# Altium PCB Sound_Card_PCB.PcbDoc (part 1 of 2)
Units mil, origin at the board's own origin, x right, y up, seen from the top; angles counter-clockwise.
Board outline 5600 x 4000 mil, 4 copper layers (Top Layer, Plane(Gnd), Plane(Power), Bottom Layer), stack 23.756 mil thick; 267 components, 253 nets, 692 pads, 200 vias.
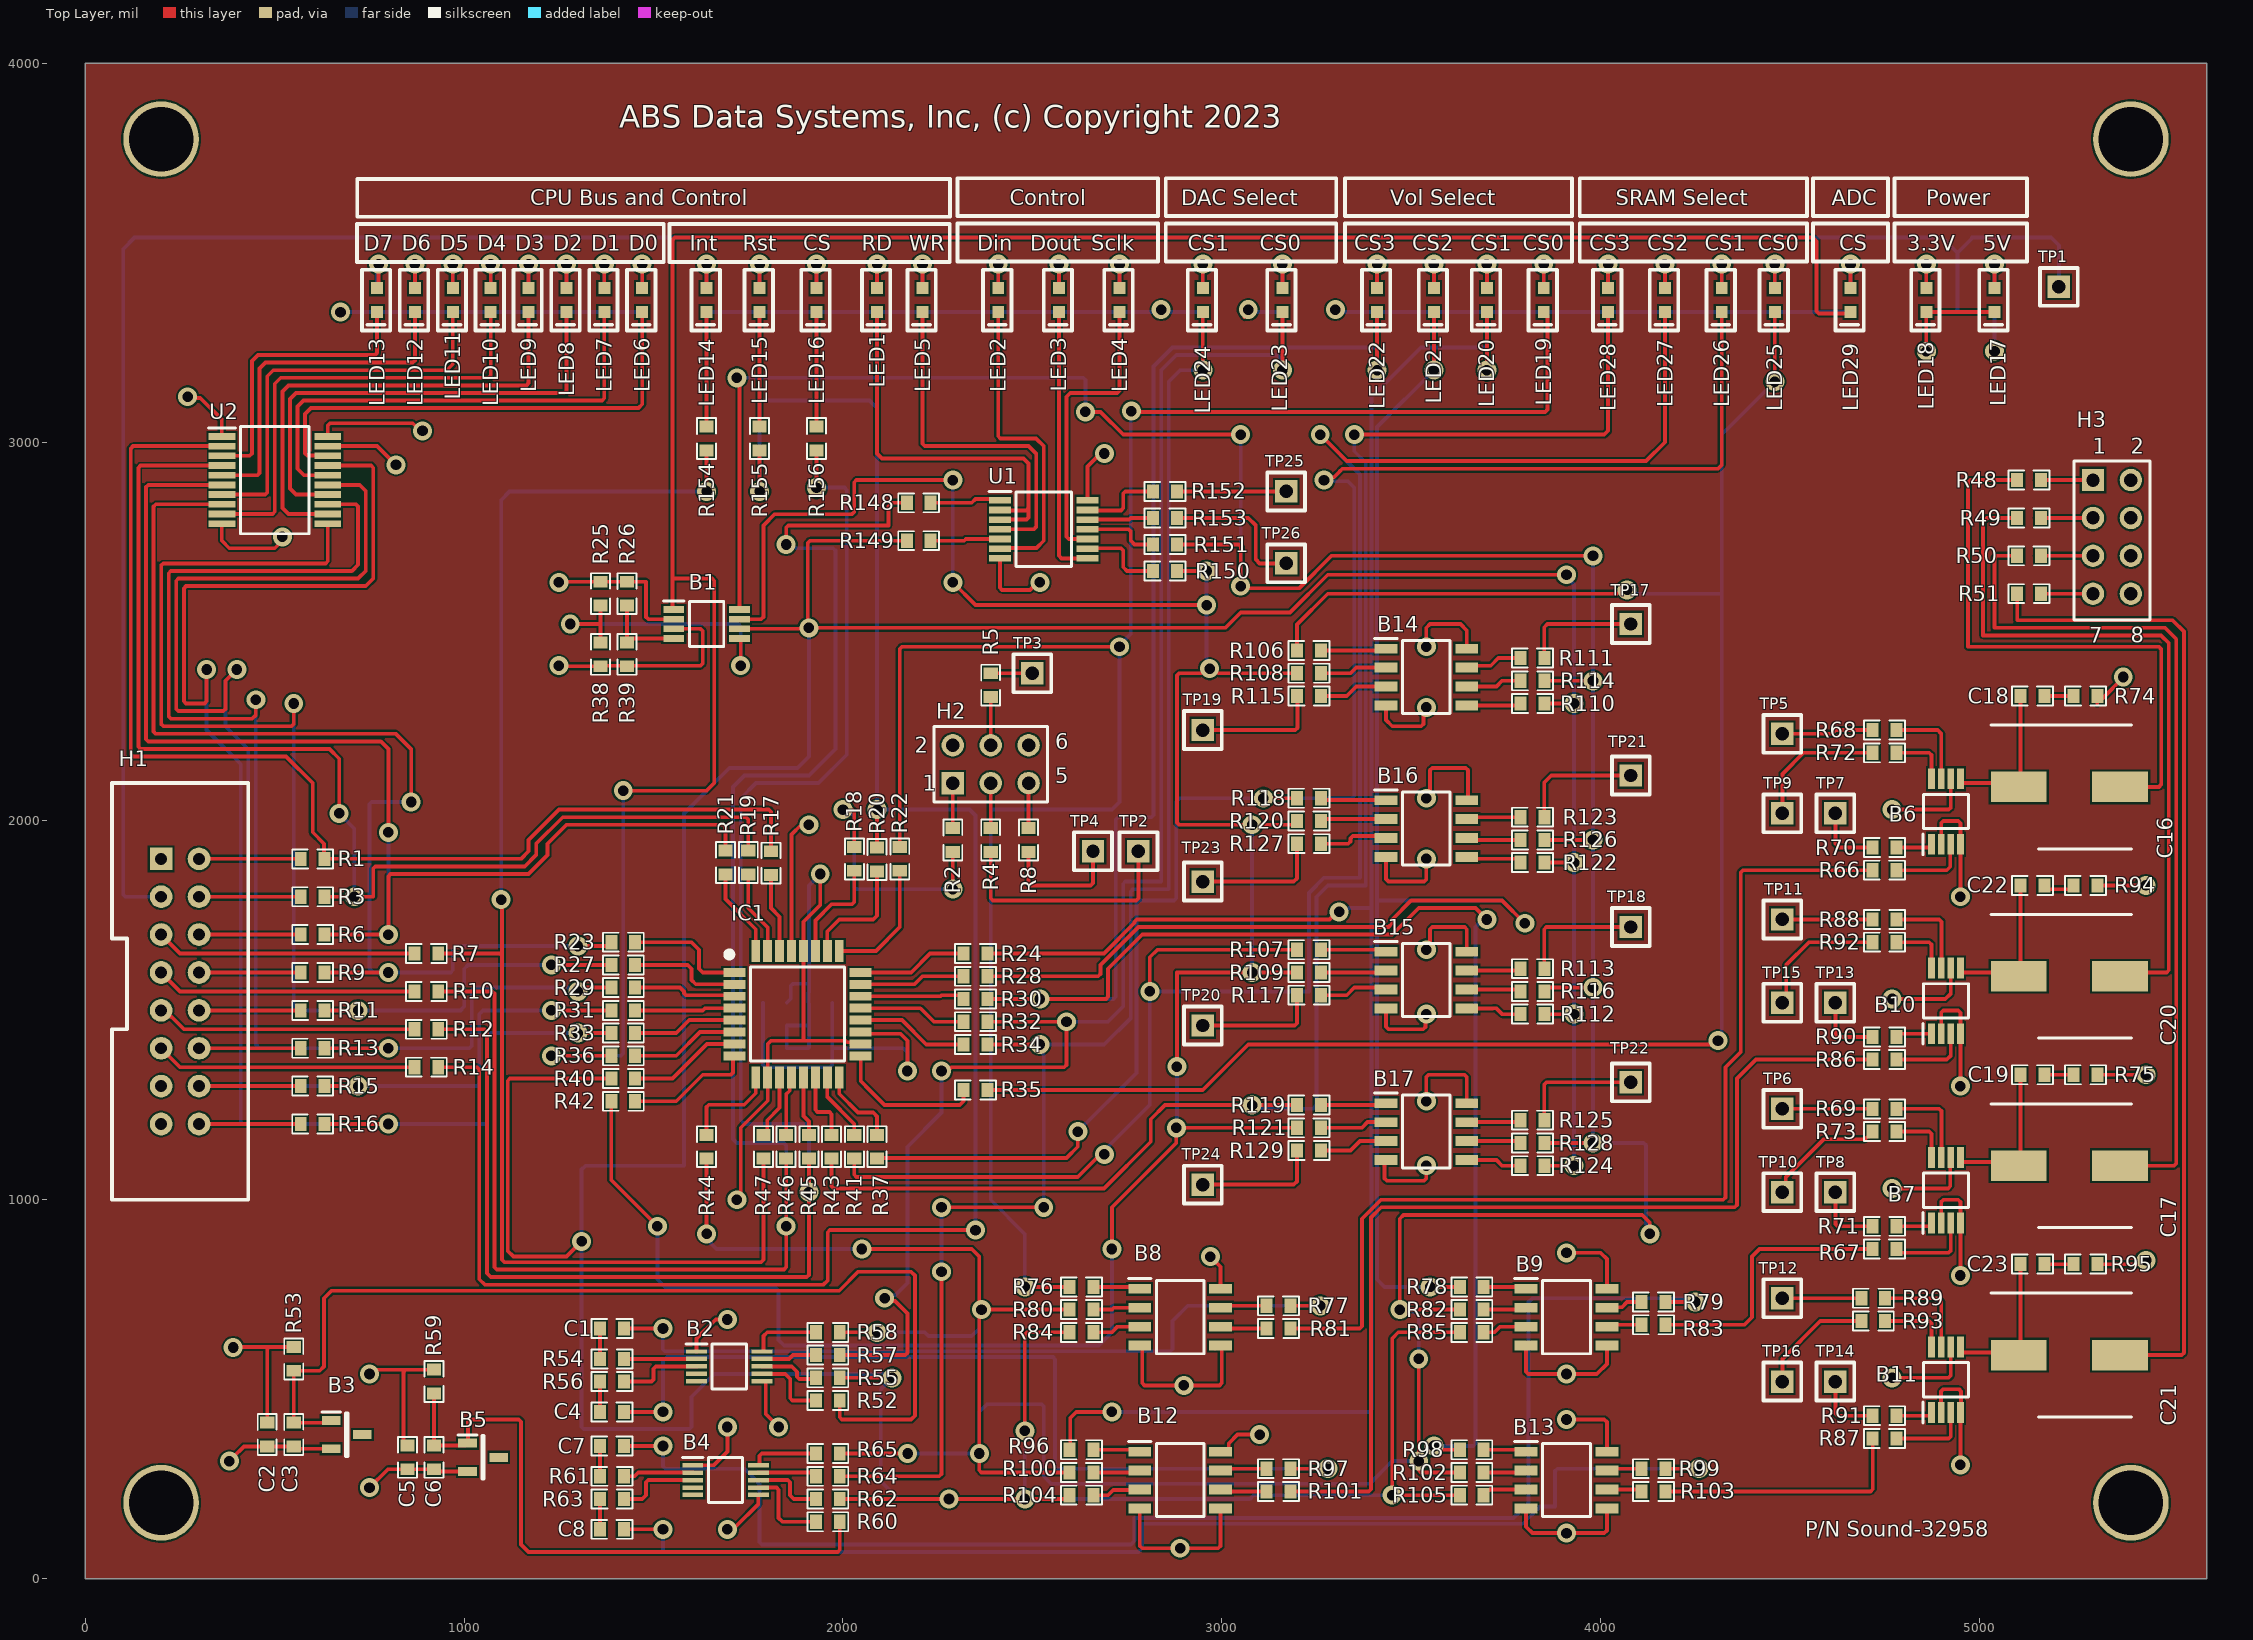
[diagram p0: Top Layer view]
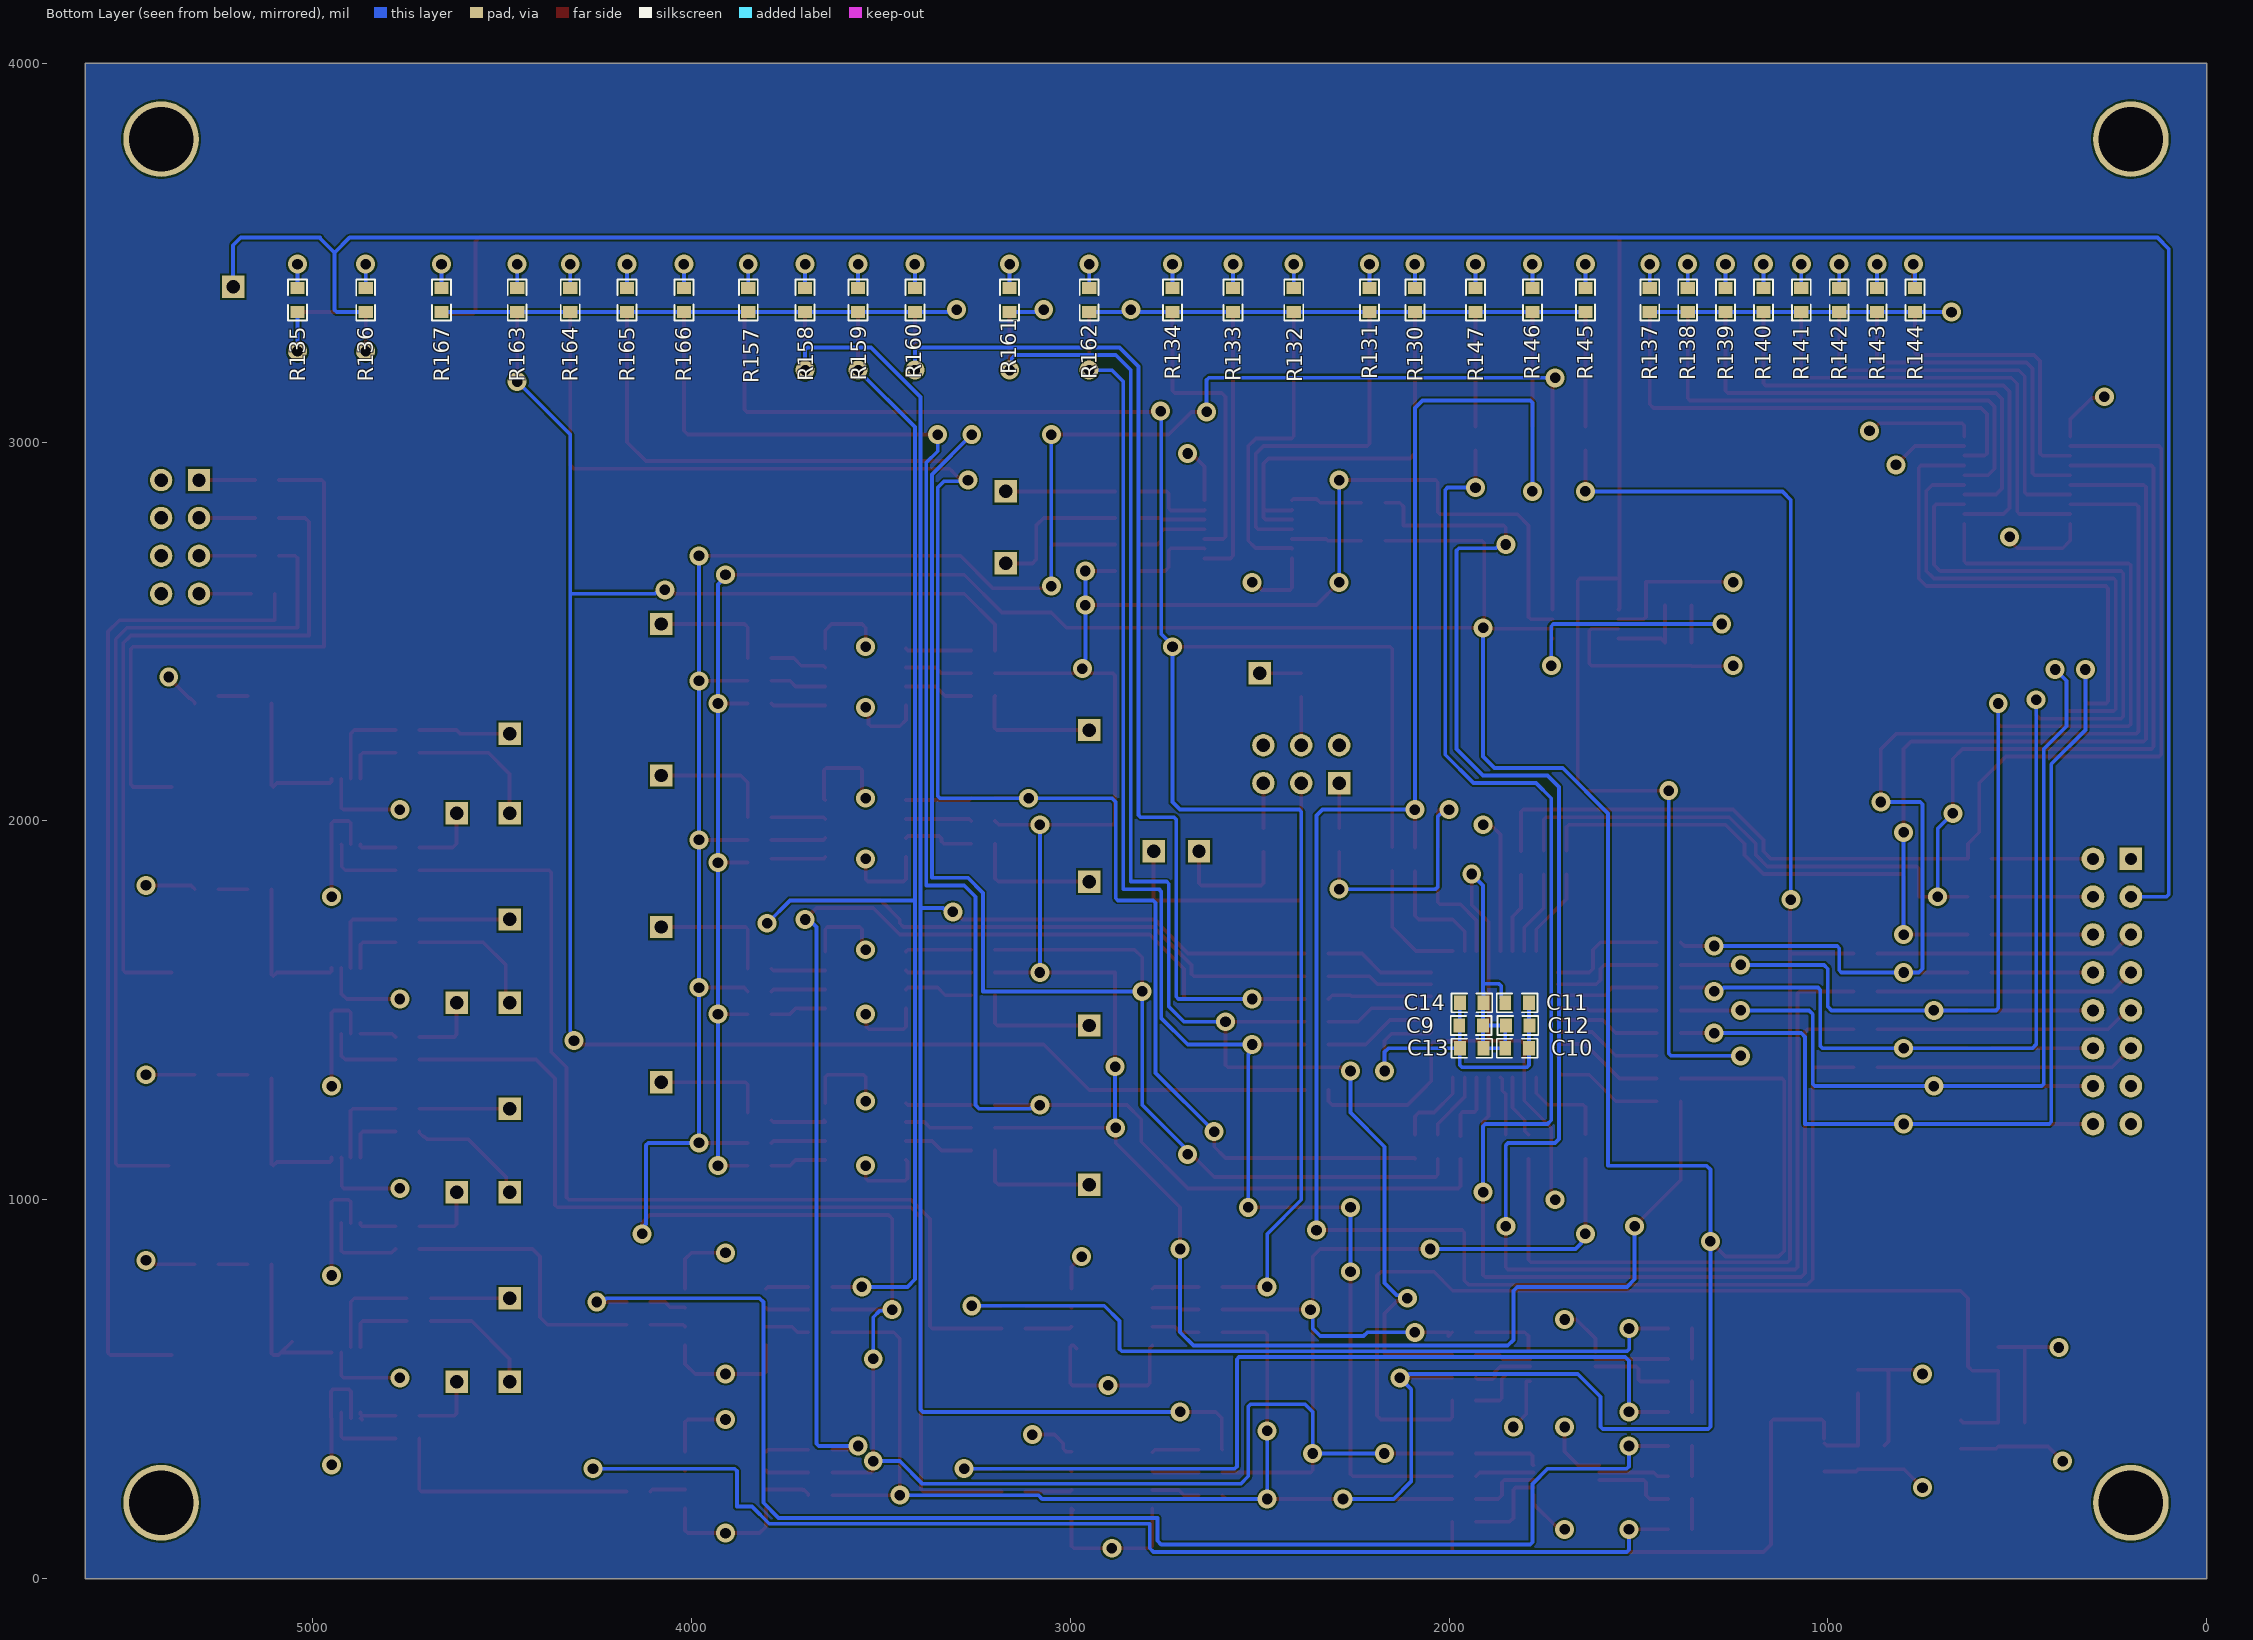
[diagram p1: Bottom Layer view, seen from below]
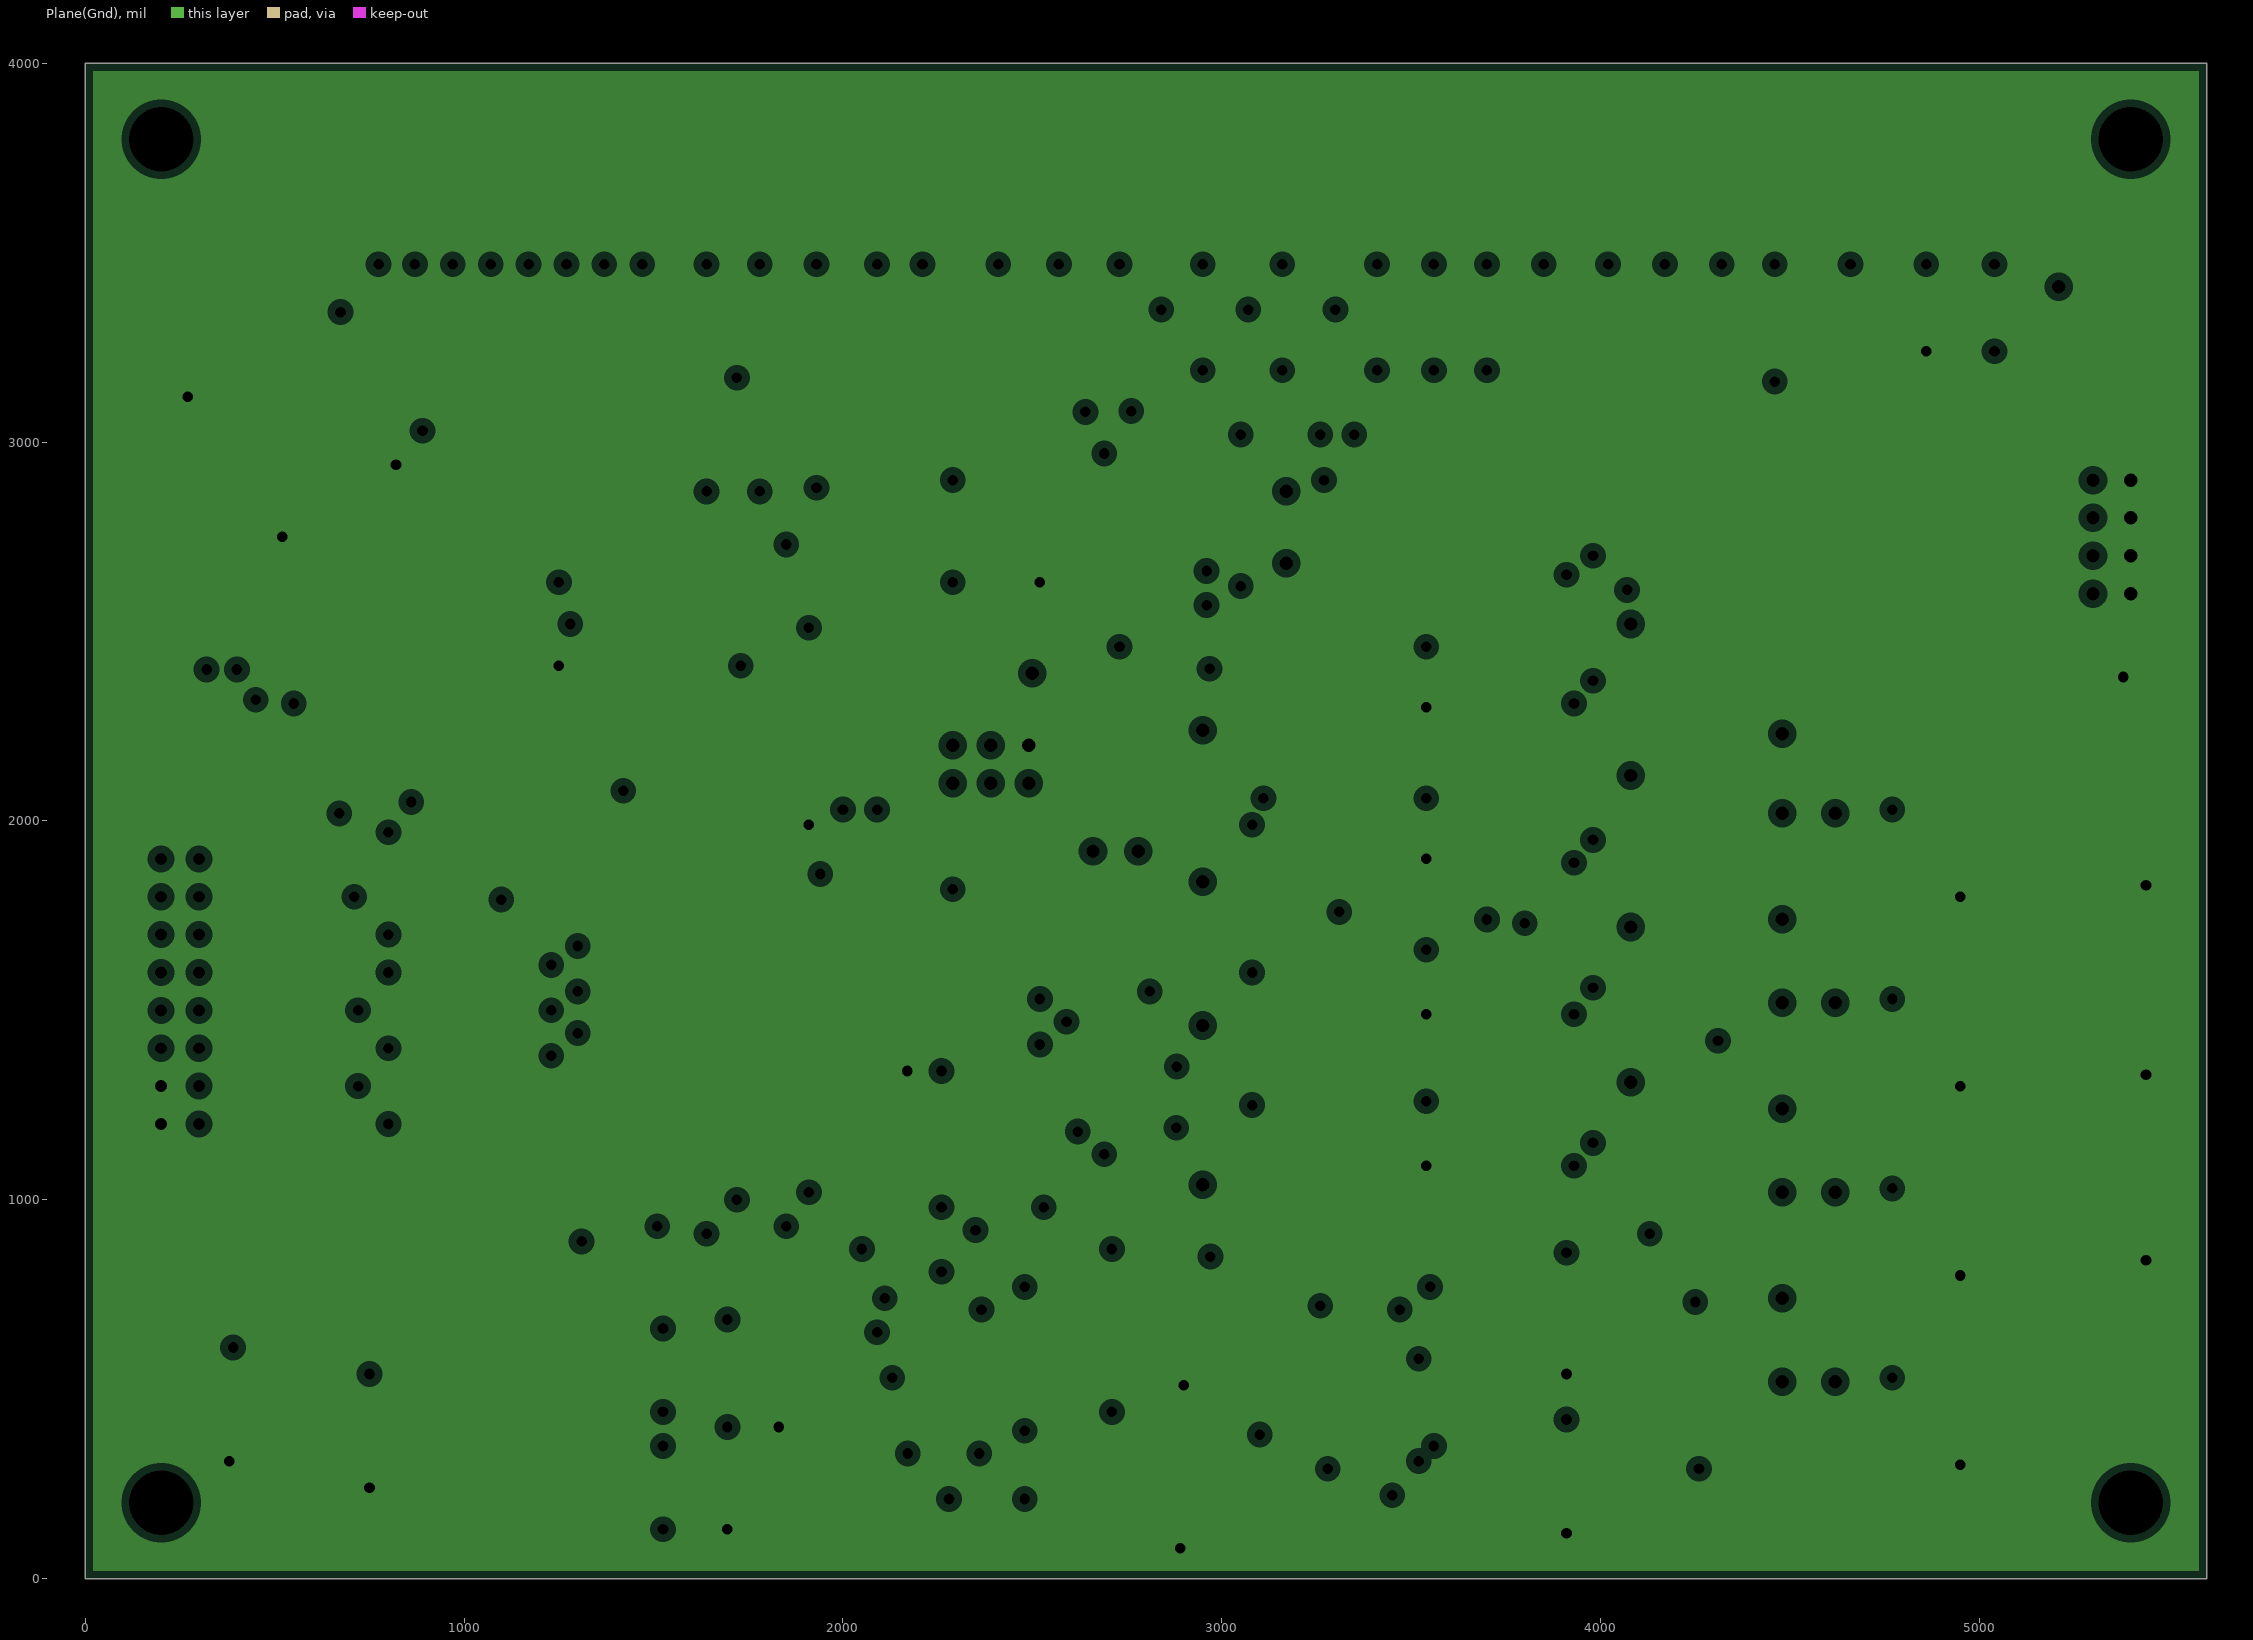
[diagram p2: Plane(Gnd), clearances drawn from the general rule]
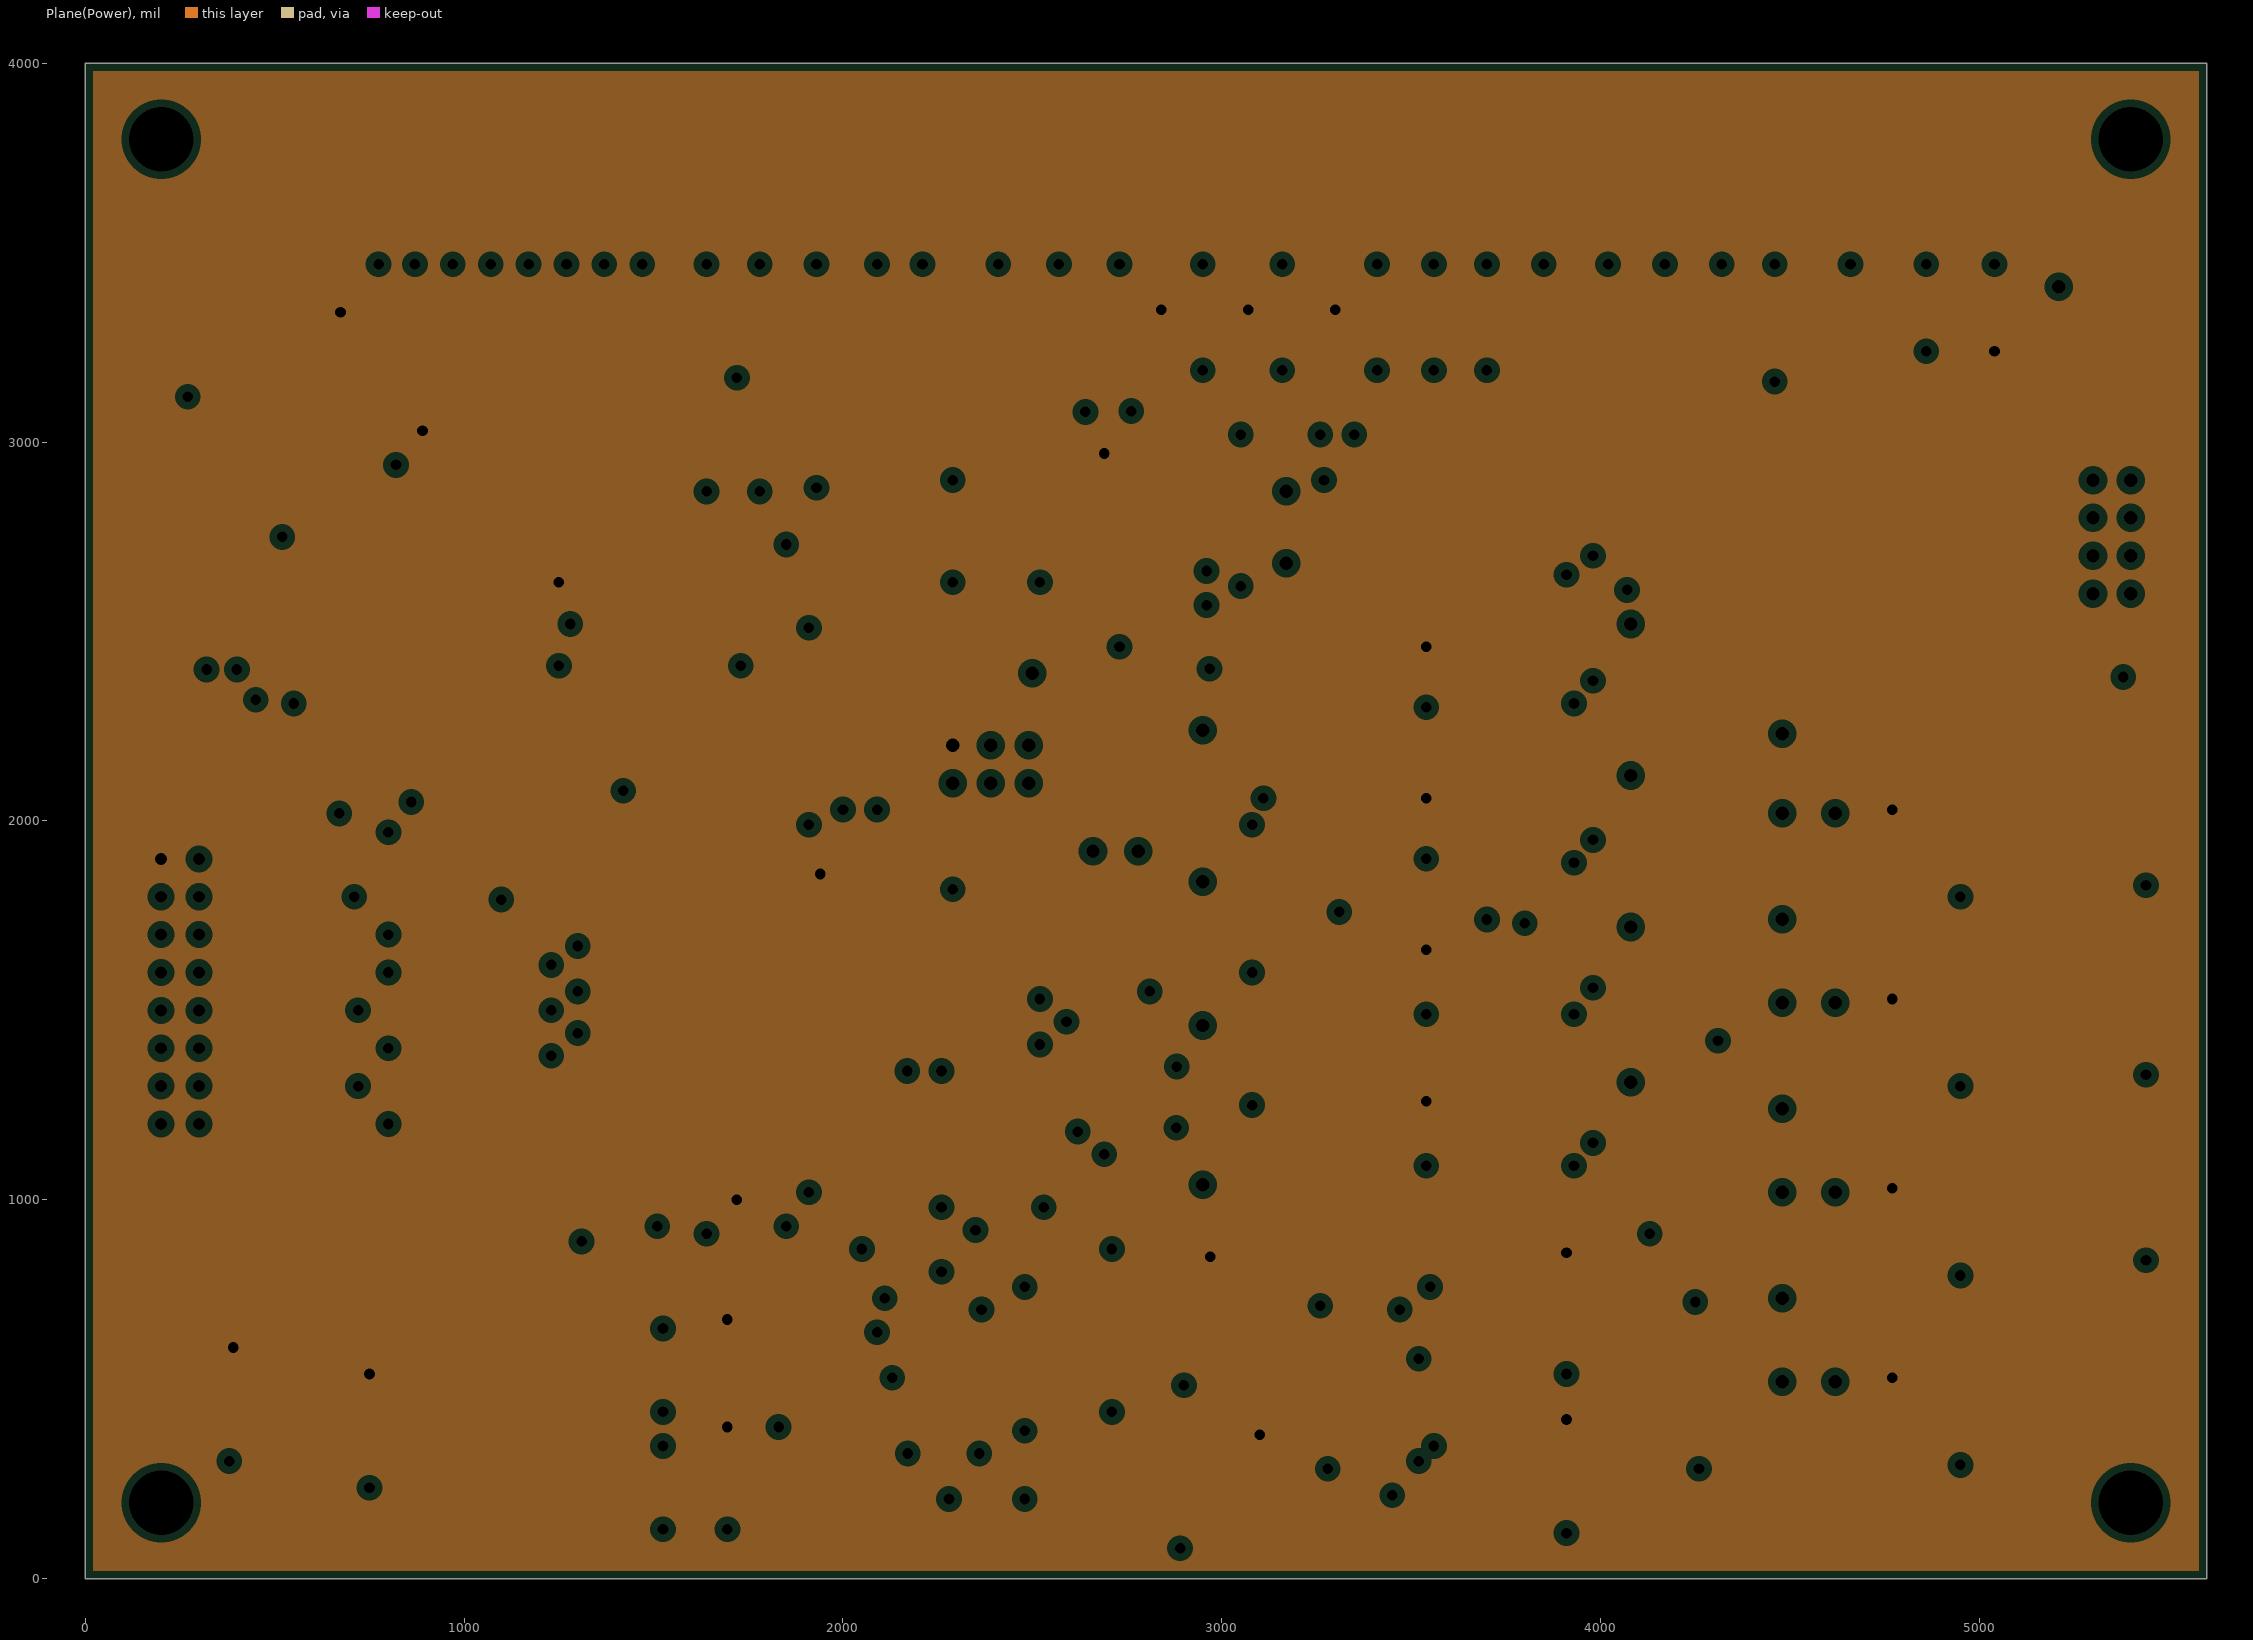
[diagram p3: Plane(Power), clearances drawn from the general rule]
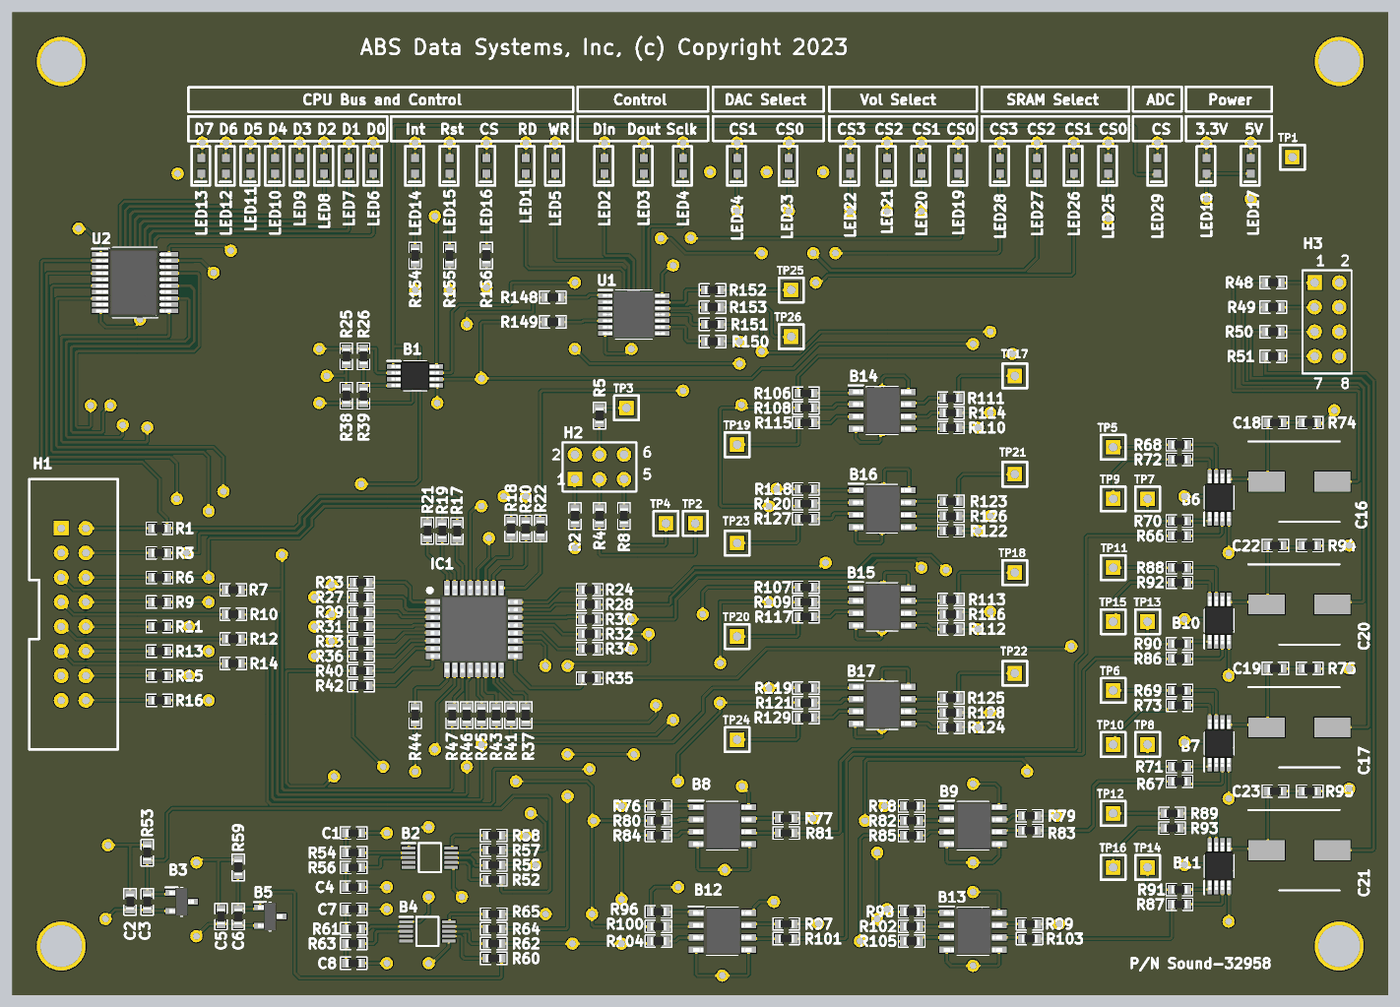
[diagram p5: 3D render of the assembled board from above, using the file's embedded part models]
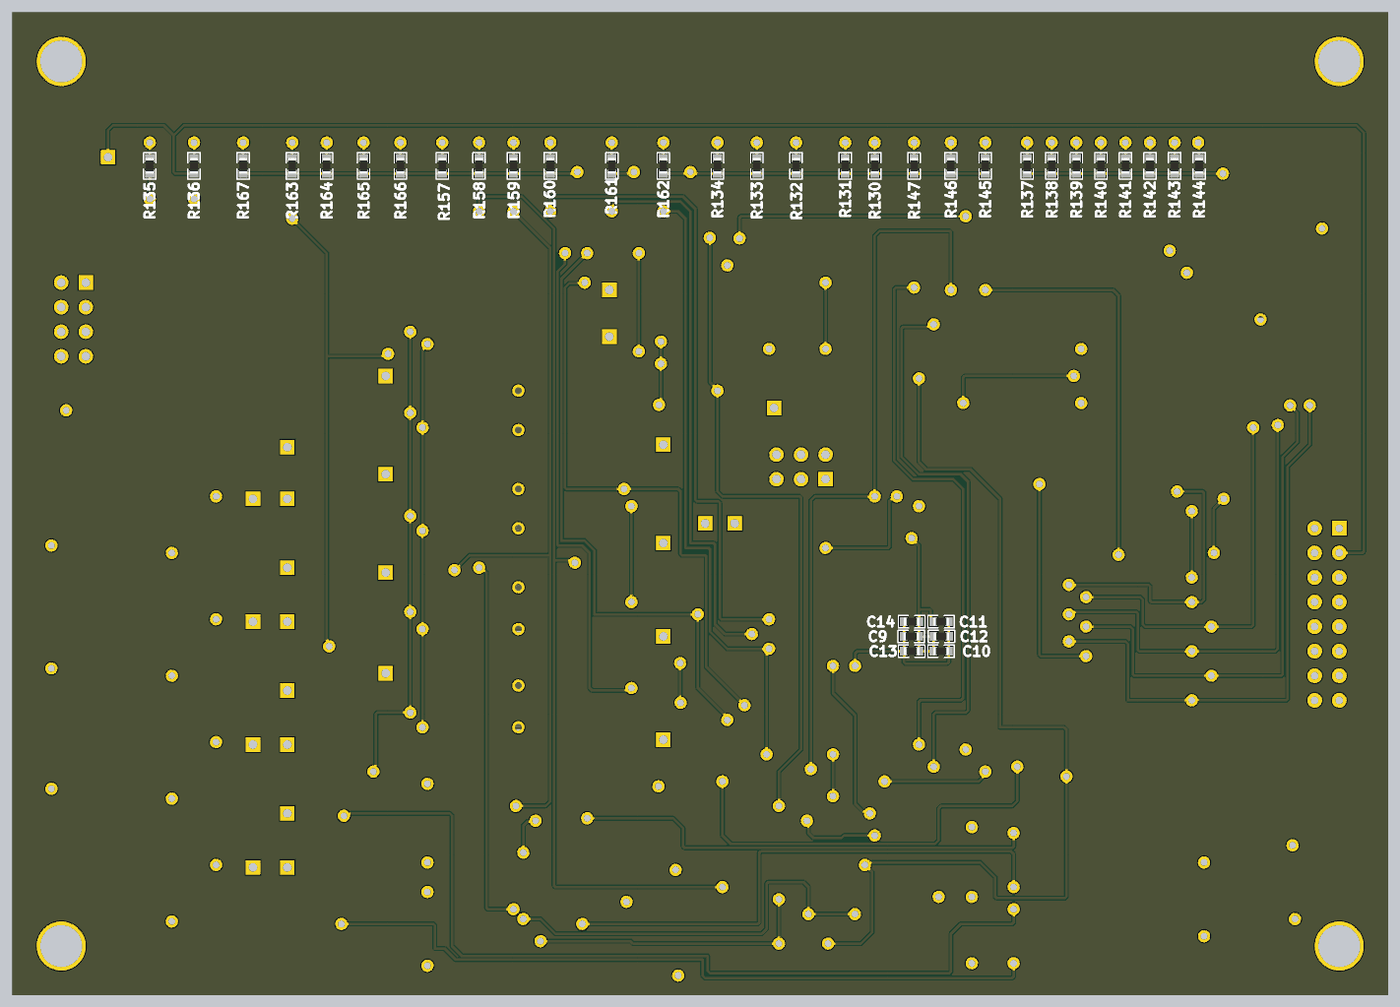
[diagram p6: 3D render of the assembled board from below, using the file's embedded part models]

## Layer stack, top to bottom
Top Solder: solder mask 0.4, Solder Resist, Dk 3.5
Top Layer: signal copper 1.4
Dielectric 2: prepreg 2.8, PP-006, Dk 4.1
Plane(Gnd): plane copper 1.378, net GND
Dielectric 1: dielectric 12.6, FR-4, Dk 4.8
Plane(Power): plane copper 1.378, net +5
Dielectric 3: prepreg 2.8, PP-006, Dk 4.1
Bottom Layer: signal copper 1.4
Bottom Solder: solder mask 0.4, Solder Resist, Dk 3.5

## Board outline
0,0 0,4000 5600,4000 5600,0

## Design rules (kind name [scope] priority, off if disabled: settings)
Clearance [All] p1: gap=5 ignorepadtopadclearanceinfootprint=FALSE
HoleSize [All] p1: absolutevalues=TRUE maxlimit=200 minlimit=1 maxpercent=80.000 minpercent=20.000
HoleToHoleClearance [All] p1: gap=5 allowstackedmicrovias=TRUE
MinimumSolderMaskSliver [All] p1: minsoldermaskwidth=5
PlaneClearance [All] p1: clearance=20
PlaneConnect [All] p1: planeconnectstyle=Relief reliefexpansion=20 reliefentries=4 reliefconductorwidth=10 reliefairgap=10
PolygonConnect [All] p1: connectstyle=Relief reliefconductorwidth=10 reliefentries=4 polygonreliefangle="90 Angle" airgapwidth=10
RoutingVias [All] p1: holewidth=28 width=50 viastyle="Through Hole" minholewidth=28 minwidth=50 maxholewidth=28 maxwidth=50
SilkToSilkClearance [All] p1: silktosilkclearance=4
SilkToSolderMaskClearance [IsPad] p1: minsilkscreentomaskgap=3.5 clearancetoexposedcopper=TRUE
SolderMaskExpansion [All] p1: expansion=4 istentingtop=FALSE
Width [All] p1: maxlimit=10 minlimit=5 preferedwidth=10 minimp=50.000000 maximp=50.000000 favimp=50.000000
23 further rules are at their usual default settings.

## Components (designator, comment, footprint, x,y, rotation, side; value= is the part's Value field where it differs from the comment)
B1 "ADC122S021CIMMX_NOPB" SOP65P490X110-8N 1640,2520 r0 top
B2 "DAC122S085CIMM_NOPB" SOP50P490X110-10N 1700,560 r0 top locked
B3 "LM4050CIM3X-4.1_NOPB" SOT95P237X95-3N 690,380 r0 top
B4 "DAC122S085CIMM_NOPB" SOP50P490X110-10N 1690,260 r0 top locked
B5 "LM4050CIM3X-4.1_NOPB" SOT95P237X95-3N 1050,320 r0 top locked
B6 "LM386MMX-1_NOPB" SOP65P490X110-8N 4912,2025 r90 top locked
B7 "LM386MMX-1_NOPB" SOP65P490X110-8N 4912,1025 r90 top locked
B8 "MCP4131-103E_SN" SOIC127P600X175-8N 2890,690 r0 top locked
B9 "MCP4131-103E_SN" SOIC127P600X175-8N 3910,690 r0 top locked
B10 "LM386MMX-1_NOPB" SOP65P490X110-8N 4912,1525 r90 top locked
B11 "LM386MMX-1_NOPB" SOP65P490X110-8N 4912,525 r90 top locked
B12 "MCP4131-103E_SN" SOIC127P600X175-8N 2890,260 r0 top locked
B13 "MCP4131-103E_SN" SOIC127P600X175-8N 3910,260 r0 top locked
B14 "23LC1024-I_SN" SOIC127P600X175-8N 3540,2380 r0 top locked
B15 "23LC1024-I_SN" SOIC127P600X175-8N 3540,1580 r0 top locked
B16 "23LC1024-I_SN" SOIC127P600X175-8N 3540,1980 r0 top locked
B17 "23LC1024-I_SN" SOIC127P600X175-8N 3540,1180 r0 top locked
C1 "1uf" 0603 1390,660 r0 top locked
C2 "100nf" 0603 480,380 r90 top
C3 "2.2uf" 0603 550,380 r90 top
C4 "1uf" 0603 1390,440 r0 top locked
C5 "100nf" 0603 850,320 r90 top
C6 "2.2uf" 0603 920,320 r90 top
C7 "1uf" 0603 1390,350 r0 top locked
C8 "1uf" 0603 1390,130 r0 top locked
C9 "100nf" 0603 1941.5,1460 r0 bottom locked
C10 "1uf" 0603 1820,1400 r180 bottom locked
C11 "100nf" 0603 1820,1520 r180 bottom locked
C12 "1uf" 0603 1818.5,1460 r180 bottom locked
C13 "100nf" 0603 1940,1400 r0 bottom locked
C14 "1uf" 0603 1940,1520 r0 bottom locked
C16 "150 uf" CAPAE830X1050N 5238,2090 r0 top locked
C17 "150 uf" CAPAE830X1050N 5238,1090 r0 top locked
C18 "1uf" 0603 5140,2330 r0 top locked
C19 "1uf" 0603 5140,1330 r0 top locked
C20 "150 uf" CAPAE830X1050N 5238,1590 r0 top locked
C21 "150 uf" CAPAE830X1050N 5238,590 r0 top locked
C22 "1uf" 0603 5140,1830 r0 top locked
C23 "1uf" 0603 5140,830 r0 top locked
H1 "Header_IDC_2x8" HEADER16 200,1900 r0 top locked
H2 "UDPI Programmer" HDR2X3 2290,2100 r0 top locked
H3 "Header_IDC_2x4" HDR2X4 5300,2900 r270 top
IC1 "AVR64DD32-I_PT" QFP80P900X900X120-32N 1880,1490 r0 top locked
LED1 "green" 0603_Diode 2090,3375 r90 top locked
LED2 "green" 0603_Diode 2410,3375 r90 top locked
LED3 "green" 0603_Diode 2570,3375 r90 top locked
LED4 "green" 0603_Diode 2730,3375 r90 top locked
LED5 "red" 0603_Diode 2210,3375 r90 top locked
LED6 "green" 0603_Diode 1470,3375 r90 top
LED7 "green" 0603_Diode 1370,3375 r90 top
LED8 "green" 0603_Diode 1270,3375 r90 top
LED9 "green" 0603_Diode 1170,3375 r90 top
LED10 "green" 0603_Diode 1070,3375 r90 top
LED11 "green" 0603_Diode 970,3375 r90 top
LED12 "green" 0603_Diode 870,3375 r90 top
LED13 "green" 0603_Diode 770,3375 r90 top
LED14 "green" 0603_Diode 1640,3375 r90 top locked
LED15 "green" 0603_Diode 1780,3375 r90 top locked
LED16 "green" 0603_Diode 1930,3375 r90 top locked
LED17 "red" 0603_Diode 5040,3375 r90 top locked
LED18 "amber" 0603_Diode 4860,3375 r90 top locked
LED19 "green" 0603_Diode 3850,3375 r90 top locked
LED20 "green" 0603_Diode 3700,3375 r90 top locked
LED21 "green" 0603_Diode 3560,3375 r90 top locked
LED22 "green" 0603_Diode 3410,3375 r90 top locked
LED23 "green" 0603_Diode 3160,3375 r90 top locked
LED24 "green" 0603_Diode 2950,3375 r90 top locked
LED25 "green" 0603_Diode 4460,3375 r90 top locked
LED26 "green" 0603_Diode 4320,3375 r90 top locked
LED27 "green" 0603_Diode 4170,3375 r90 top locked
LED28 "green" 0603_Diode 4020,3375 r90 top locked
LED29 "green" 0603_Diode 4660,3375 r90 top
R1 "0R" 0603 600,1900 r180 top
R2 "0R" 0603 2290,1950 r90 top locked
R3 "0R" 0603 600,1800 r180 top
R4 "0R" 0603 2390,1950 r90 top locked
R5 "0R" 0603 2390,2358.5 r90 top
R6 "0R" 0603 600,1700 r180 top
R7 "0R" 0603 900,1650 r0 top locked
R8 "0R" 0603 2490,1950 r90 top locked
R9 "0R" 0603 600,1600 r180 top
R10 "0R" 0603 900,1550 r0 top locked
R11 "0R" 0603 600,1500 r180 top
R12 "0R" 0603 900,1450 r0 top locked
R13 "0R" 0603 600,1400 r180 top
R14 "0R" 0603 900,1350 r0 top locked
R15 "0R" 0603 600,1300 r180 top
R16 "0R" 0603 600,1200 r180 top
R17 "0R" 0603 1810,1888.5 r270 top locked
R18 "0R" 0603 2030,1900 r90 top locked
R19 "0R" 0603 1750,1890 r270 top locked
R20 "0R" 0603 2090,1898.5 r90 top locked
R21 "0R" 0603 1690,1890 r270 top locked
R22 "0R" 0603 2150,1900 r90 top locked
R23 "0R" 0603 1420,1680 r0 top locked
R24 "0R" 0603 2350,1650 r0 top locked
R25 "220" 0603 1360,2600 r270 top
R26 "220" 0603 1430,2600 r90 top
R27 "0R" 0603 1420,1620 r0 top locked
R28 "0R" 0603 2350,1590 r0 top locked
R29 "0R" 0603 1420,1560 r0 top locked
R30 "0R" 0603 2350,1530 r0 top locked
R31 "0R" 0603 1420,1500 r0 top locked
R32 "0R" 0603 2350,1470 r0 top locked
R33 "0R" 0603 1420,1440 r0 top locked
R34 "0R" 0603 2350,1410 r0 top locked
R35 "0R" 0603 2350,1290 r0 top locked
R36 "0R" 0603 1420,1380 r0 top locked
R37 "0R" 0603 2090,1140 r270 top locked
R38 "220" 0603 1360,2440 r90 top
R39 "220" 0603 1430,2440 r270 top
R40 "0R" 0603 1420,1320 r0 top locked
R41 "0R" 0603 2030,1140 r270 top locked
R42 "0R" 0603 1420,1260 r0 top locked
R43 "0R" 0603 1970,1140 r270 top locked
R44 "0R" 0603 1640,1140 r90 top locked
R45 "0R" 0603 1910,1140 r270 top locked
R46 "0R" 0603 1850,1140 r270 top locked
R47 "0R" 0603 1790,1140 r270 top locked
R48 "0R" 0603 5131.5,2900 r0 top
R49 "0R" 0603 5131.5,2800 r0 top
R50 "0R" 0603 5131.5,2700 r0 top
R51 "0R" 0603 5131.5,2600 r0 top
R52 "0R" 0603 1960,470 r180 top locked
R53 "910" 0603 550,580 r270 top
R54 "0R" 0603 1390,580 r180 top locked
R55 "0R" 0603 1960,530 r180 top locked
R56 "0R" 0603 1390,520 r180 top locked
R57 "0R" 0603 1960,590 r180 top locked
R58 "0R" 0603 1960,650 r180 top locked
R59 "910" 0603 920,520 r270 top
R60 "0R" 0603 1960,150 r180 top locked
R61 "0R" 0603 1390,270 r180 top locked
R62 "0R" 0603 1960,210 r180 top locked
R63 "0R" 0603 1390,210 r180 top locked
R64 "0R" 0603 1960,270 r180 top locked
R65 "0R" 0603 1960,330 r180 top locked
R66 "0R" 0603 4750,1870 r0 top
R67 "0R" 0603 4750,870 r0 top
R68 "0R" 0603 4750,2240 r180 top
R69 "0R" 0603 4750,1240 r180 top
R70 "0R" 0603 4750,1930 r180 top
R71 "0R" 0603 4750,930 r180 top
R72 "0R" 0603 4750,2180 r180 top
R73 "0R" 0603 4750,1180 r180 top
R74 "10" 0603 5280,2330 r180 top locked
R75 "10" 0603 5280,1330 r180 top locked
R76 "0R" 0603 2630,770 r0 top locked
R77 "0R" 0603 3150,720 r0 top locked
R78 "0R" 0603 3660,770 r0 top locked
R79 "0R" 0603 4140,730 r0 top locked
R80 "0R" 0603 2630,710 r0 top locked
R81 "0R" 0603 3150,660 r0 top locked
R82 "0R" 0603 3660,710 r0 top locked
R83 "0R" 0603 4140,670 r0 top locked
R84 "0R" 0603 2630,650 r0 top locked
R85 "0R" 0603 3660,650 r0 top locked
R86 "0R" 0603 4750,1370 r0 top
R87 "0R" 0603 4750,370 r0 top
R88 "0R" 0603 4750,1740 r180 top
R89 "0R" 0603 4720,740 r180 top
R90 "0R" 0603 4750,1430 r180 top
R91 "0R" 0603 4750,430 r180 top
R92 "0R" 0603 4750,1680 r180 top
R93 "0R" 0603 4720,680 r180 top
R94 "10" 0603 5280,1830 r180 top locked
R95 "10" 0603 5280,830 r180 top
R96 "0R" 0603 2630,340 r0 top locked
R97 "0R" 0603 3150,290 r0 top locked
R98 "0R" 0603 3660,340 r0 top locked
R99 "0R" 0603 4140,290 r0 top locked
R100 "0R" 0603 2630,280 r0 top locked
R101 "0R" 0603 3150,230 r0 top locked
R102 "0R" 0603 3660,280 r0 top locked
R103 "0R" 0603 4140,230 r0 top locked
R104 "0R" 0603 2630,220 r0 top locked
R105 "0R" 0603 3660,220 r0 top locked
R106 "0R" 0603 3230,2450 r0 top locked
R107 "0R" 0603 3230,1660 r0 top locked
R108 "0R" 0603 3230,2390 r0 top locked
R109 "0R" 0603 3230,1600 r0 top locked
R110 "0R" 0603 3820,2310 r180 top locked
R111 "0R" 0603 3820,2430 r0 top locked
R112 "0R" 0603 3820,1490 r180 top locked
R113 "0R" 0603 3820,1610 r0 top locked
R114 "0R" 0603 3820,2370 r180 top locked
R115 "0R" 0603 3230,2330 r180 top locked
R116 "0R" 0603 3820,1550 r180 top locked
R117 "0R" 0603 3230,1540 r180 top locked
R118 "0R" 0603 3230,2060 r0 top locked
R119 "0R" 0603 3230,1250 r0 top locked
R120 "0R" 0603 3230,2000 r0 top locked
R121 "0R" 0603 3230,1190 r0 top locked
R122 "0R" 0603 3820,1890 r180 top
R123 "0R" 0603 3820,2010 r0 top locked
R124 "0R" 0603 3820,1090 r180 top locked
R125 "0R" 0603 3820,1210 r0 top locked
R126 "0R" 0603 3820,1950 r180 top locked
R127 "0R" 0603 3230,1940 r180 top locked
R128 "0R" 0603 3820,1150 r180 top locked
R129 "0R" 0603 3230,1130 r180 top locked
R130 "180" 0603 2090,3375 r270 bottom locked
R131 "180" 0603 2210,3375 r270 bottom locked
R132 "180" 0603 2410,3375 r270 bottom locked
R133 "180" 0603 2570,3375 r270 bottom locked
R134 "180" 0603 2730,3375 r270 bottom locked
R135 "180" 0603 5040,3375 r270 bottom
R136 "47" 0603 4860,3375 r90 bottom
R137 "180" 0603 1470,3375 r270 bottom
R138 "180" 0603 1370,3375 r270 bottom
R139 "180" 0603 1270,3375 r270 bottom
R140 "180" 0603 1170,3375 r270 bottom
R141 "180" 0603 1070,3375 r270 bottom
R142 "180" 0603 970,3375 r270 bottom
R143 "180" 0603 870,3375 r270 bottom
R144 "180" 0603 770,3375 r270 bottom
R145 "180" 0603 1640,3375 r270 bottom locked
R146 "180" 0603 1780,3375 r270 bottom locked
R147 "180" 0603 1930,3375 r270 bottom locked
R148 "0R" 0603 2200,2840 r0 top locked
R149 "0R" 0603 2200,2740 r0 top locked
R150 "0R" 0603 2850,2660 r180 top locked
R151 "0R" 0603 2850,2730 r180 top locked
R152 "0R" 0603 2850,2870 r180 top locked
R153 "0R" 0603 2850,2800 r0 top locked
R154 "0R" 0603 1640,3010 r90 top locked
R155 "0R" 0603 1780,3010 r90 top locked
R156 "0R" 0603 1930,3010 r90 top locked
R157 "180" 0603 3850,3375 r270 bottom locked
R158 "180" 0603 3700,3375 r270 bottom locked
R159 "180" 0603 3560,3375 r270 bottom locked
R160 "180" 0603 3410,3375 r270 bottom locked
R161 "180" 0603 3160,3375 r270 bottom locked
R162 "180" 0603 2950,3375 r270 bottom locked
R163 "180" 0603 4460,3375 r270 bottom
R164 "180" 0603 4320,3375 r270 bottom
R165 "180" 0603 4170,3375 r270 bottom
R166 "180" 0603 4020,3375 r270 bottom
R167 "180" 0603 4660,3375 r270 bottom
TP1 "TP" TP 5210,3410 r0 top
TP2 "TP" TP 2780,1920 r0 top
TP3 "TP" TP 2500,2390 r0 top
TP4 "TP" TP 2660,1920 r0 top
TP5 "TP" TP 4480,2230 r0 top
TP6 "TP" TP 4480,1240 r0 top
TP7 "TP" TP 4620,2020 r0 top
TP8 "TP" TP 4620,1020 r0 top
TP9 "TP" TP 4480,2020 r0 top
TP10 "TP" TP 4480,1020 r0 top
TP11 "TP" TP 4480,1740 r0 top
TP12 "TP" TP 4480,740 r0 top
TP13 "TP" TP 4620,1520 r0 top
TP14 "TP" TP 4620,520 r0 top
TP15 "TP" TP 4480,1520 r0 top
TP16 "TP" TP 4480,520 r0 top
TP17 "TP" TP 4080,2520 r0 top locked
TP18 "TP" TP 4080,1720 r0 top locked
TP19 "TP" TP 2950,2240 r0 top locked
TP20 "TP" TP 2950,1460 r0 top locked
TP21 "TP" TP 4080,2120 r0 top locked
TP22 "TP" TP 4080,1310 r0 top locked
TP23 "TP" TP 2950,1840 r0 top locked
TP24 "TP" TP 2950,1040 r0 top
TP25 "TP" TP 3170,2870 r0 top
TP26 "TP" TP 3170,2680 r0 top
U1 "SN74AC04PWR" SOP65P640X120-14N 2530,2770 r0 top locked
U2 "SN74ABT240ADBR" SOP65P780X200-20N 500,2900 r0 top locked

## Footprints (in the part's own frame and the unit in brackets; to place one, negate y for a bottom-side part, rotate by r counter-clockwise, add the part's x,y. Pads: shape width x height; smd on the part's side, far side on the other; paste and mask are expansions set on the pad)
0603 [mm]
  rect 0.8x0.95 smd: 1(-0.8,0) 2(0.8,0)
  silkscreen extent -1.37,-0.64 1.37,0.64, body extent -0.8,-0.4 0.8,0.4, height 0.55
0603_Diode [mm]
  rect 0.8x0.8 smd: 1(-0.8,0) 2(0.8,0)
  silkscreen extent -2.03,-0.89 2.03,1.02
CAPAE830X1050N [mm]
  rect 3.75x2.05 smd: 1(-3.4,0) 2(3.4,0)
  silkscreen extent -5.28,-4.15 4.15,4.15
HDR2X3 [mm] "Connector; Header; 3x2 Position"
  rect 1.5x1.5 hole 0.9: 1(0,0)
  round 1.5 hole 0.9: 2(0,2.54) 3(2.54,0) 4(2.54,2.54) 5(5.08,0) 6(5.08,2.54)
  silkscreen extent -1.27,-1.27 6.35,3.81
HDR2X4 [mm] "Connector; Header; 4x2 Position"
  rect 1.5x1.5 hole 0.9: 1(0,0)
  round 1.5 hole 0.9: 2(0,2.54) 3(2.54,0) 4(2.54,2.54) 5(5.08,0) 6(5.08,2.54) 7(7.62,0) 8(7.62,2.54)
  silkscreen extent -1.27,-1.27 9.4,3.81
HEADER16 [mil]
  rect 60x60 hole 31.5: 1(0,0)
  round 60 hole 31.5: 2(100,0) 3(0,-100) 4(100,-100) 5(0,-200) 6(100,-200) 7(0,-300) 8(100,-300) 9(0,-400) 10(100,-400) 11(0,-500) 12(100,-500) 13(0,-600) 14(100,-600) 15(0,-700) 16(100,-700)
  silkscreen extent -130,-900 230,200
QFP80P900X900X120-32N [mm]
  rect 1.475x0.6 smd: 1(-4.238,2.8) 2(-4.238,2) 3(-4.238,1.2) 4(-4.238,0.4) 5(-4.238,-0.4) 6(-4.238,-1.2) 7(-4.238,-2) 8(-4.238,-2.8) 17(4.238,-2.8) 18(4.238,-2) 19(4.238,-1.2) 20(4.238,-0.4) 21(4.238,0.4) 22(4.238,1.2) 23(4.238,2) 24(4.238,2.8)
  rect 0.6x1.475 smd: 9(-2.8,-4.238) 10(-2,-4.238) 11(-1.2,-4.238) 12(-0.4,-4.238) 13(0.4,-4.238) 14(1.2,-4.238) 15(2,-4.238) 16(2.8,-4.238) 25(2.8,4.238) 26(2,4.238) 27(1.2,4.238) 28(0.4,4.238) 29(-0.4,4.238) 30(-1.2,4.238) 31(-2,4.238) 32(-2.8,4.238)
  silkscreen extent -4.77,-3.15 3.15,4.2, body extent -4.5,-4.5 4.5,4.5, height 1.2
SOIC127P600X175-8N [mm]
  rect 1.528x0.65 smd: 1(-2.711,1.905) 2(-2.711,0.635) 3(-2.711,-0.635) 4(-2.711,-1.905) 5(2.711,-1.905) 6(2.711,-0.635) 7(2.711,0.635) 8(2.711,1.905)
  silkscreen extent -3.47,-2.45 1.6,2.58, body extent -3.01,-2.45 3.01,2.45, height 1.63
SOP50P490X110-10N [mm]
  rect 1.4x0.3 smd: 1(-2.2,1) 2(-2.2,0.5) 3(-2.2,0) 4(-2.2,-0.5) 5(-2.2,-1) 6(2.2,-1) 7(2.2,-0.5) 8(2.2,0) 9(2.2,0.5) 10(2.2,1)
  silkscreen extent -2.9,-1.5 1.15,1.5, body extent -2.21,-1.5 2.72,1.5, height 1.1
SOP65P490X110-8N [mm]
  rect 1.4x0.45 smd: 1(-2.2,0.975) 2(-2.2,0.325) 3(-2.2,-0.325) 4(-2.2,-0.975) 5(2.2,-0.975) 6(2.2,-0.325) 7(2.2,0.325) 8(2.2,0.975)
  silkscreen extent -2.9,-1.5 1.15,1.55, body extent -2.45,-1.5 2.45,1.5, height 1.1
SOP65P640X120-14N [mm]
  rect 1.475x0.45 smd: 1(-2.938,1.95) 2(-2.938,1.3) 3(-2.938,0.65) 4(-2.938,0) 5(-2.938,-0.65) 6(-2.938,-1.3) 7(-2.938,-1.95) 8(2.938,-1.95) 9(2.938,-1.3) 10(2.938,-0.65) 11(2.938,0) 12(2.938,0.65) 13(2.938,1.3) 14(2.938,1.95)
  silkscreen extent -3.67,-2.5 1.85,2.52, body extent -3.2,-2.5 3.2,2.5, height 1.13
SOP65P780X200-20N [mm]
  rect 1.8x0.45 smd: 1(-3.55,2.925) 2(-3.55,2.275) 3(-3.55,1.625) 4(-3.55,0.975) 5(-3.55,0.325) 6(-3.55,-0.325) 7(-3.55,-0.975) 8(-3.55,-1.625) 9(-3.55,-2.275) 10(-3.55,-2.925) 11(3.55,-2.925) 12(3.55,-2.275) 13(3.55,-1.625) 14(3.55,-0.975) 15(3.55,-0.325) 16(3.55,0.325) 17(3.55,0.975) 18(3.55,1.625) 19(3.55,2.275) 20(3.55,2.925)
  silkscreen extent -4.45,-3.6 2.3,3.6, body extent -4.03,-3.6 3.77,3.6, height 1.9
SOT95P237X95-3N [mm]
  rect 1.25x0.6 smd: 1(-1.05,0.95) 2(-1.05,-0.95) 3(1.05,0)
  silkscreen extent -1.68,-1.46 0.08,1.5, body extent -1.27,-1.46 1.27,1.46, height 1
TP [mm] "Test Point"
  rect 1.5x1.5 hole 0.9: 1(0,0)
  silkscreen extent -1.27,-1.27 1.27,1.27

## Part data
B1: "2 Channel, 50 ksps to 200 ksps 12-Bit A/D Converter", Manufacturer_Name="Texas Instruments", Manufacturer_Part_Number=ADC122S021CIMMX/NOPB, Mouser Part Number=926-A122S021CIMMXNPB, Datasheet Link=http://www.ti.com/lit/gpn/ADC122S021, Geometry.Height=1.1mm, Mouser Price/Stock=https://www.mouser.co.uk/ProductDetail/Texas-Instruments/ADC122S021CIMMX-NOPB/?qs=7X5t%252BdzoRHB2bC7Teu8H3A%3D%3D
B2 B4: "12-Bit Micro Power DUAL Digital-to-Analog Converter with Rail-to-Rail Output", Manufacturer_Name="Texas Instruments", Manufacturer_Part_Number=DAC122S085CIMM/NOPB, Mouser Part Number=926-DAC122S085CIMMNO, Datasheet Link=http://www.ti.com/lit/gpn/dac122s085, Geometry.Height=1.1mm, Mouser Price/Stock=https://www.mouser.co.uk/ProductDetail/Texas-Instruments/DAC122S085CIMM-NOPB/?qs=7X5t%252BdzoRHCSswOz%252BE6yGA%3D%3D
B3 B5: "50ppm/C Precision Micropower Shunt Voltage Reference", Manufacturer_Name="Texas Instruments", Manufacturer_Part_Number=LM4050CIM3X-4.1/NOPB, Mouser Part Number=926-LM4050CIM3X41NPB, Datasheet Link=http://www.ti.com/lit/gpn/lm4050-n, Geometry.Height=0.95mm, Mouser Price/Stock=https://www.mouser.co.uk/ProductDetail/Texas-Instruments/LM4050CIM3X-4.1-NOPB?qs=QbsRYf82W3Em%2F29oRlpByg%3D%3D
B6 B7 B10 B11: "Wide Input Voltage Low Power Audio Amplifier with Internal Gain", Manufacturer_Name="Texas Instruments", Manufacturer_Part_Number=LM386MMX-1/NOPB, Mouser Part Number=926-LM386MMX-1/NOPB, Datasheet Link=http://www.ti.com/lit/gpn/lm386, Geometry.Height=1.1mm, Mouser Price/Stock=https://www.mouser.co.uk/ProductDetail/Texas-Instruments/LM386MMX-1-NOPB?qs=QbsRYf82W3EjpN1OWIJmZA%3D%3D
B8 B9 B12 B13: "Digital Potentiometer 128 Step 10kOhm", Manufacturer_Name=Microchip, Manufacturer_Part_Number=MCP4132-103E/SN, Mouser Part Number=579-MCP4132-103E/SN, Datasheet Link=http://ww1.microchip.com/downloads/en/DeviceDoc/22060b.pdf, Geometry.Height=1.75mm, Mouser Price/Stock=https://www.mouser.co.uk/ProductDetail/Microchip-Technology/MCP4132-103E-SN?qs=hH%252BOa0VZEiDq5PW83qTf7Q%3D%3D
B14 B15 B16 B17: "SRAM,1Mbit,2.5V,20MHz,SPI/SDI/SQI,SOIC8 23LC1024-I/SN,  SRAM Memory 1Mbit, 128K words x 8 bit, 20MHz,, 2.5 to 5.5 V, 8-Pin, SOIC", Manufacturer_Name=Microchip, Manufacturer_Part_Number=23LC1024-I/SN, Mouser Part Number=579-23LC1024-I/SN, Datasheet Link=http://ww1.microchip.com/downloads/en/DeviceDoc/20005142C.pdf, Geometry.Height=1.75mm, Mouser Price/Stock=https://www.mouser.co.uk/ProductDetail/Microchip-Technology-Atmel/23LC1024-I-SN?qs=q1LPnGnpSmb1WpXt0vqW%2FQ%3D%3D
C1 C4 C7 C8 C10 C12 C14 C18 C19 C22 C23: library part CL10B105KA8NNNL, "Samsung Electro-Mechanics 0603 1uf"
C2 C5 C9 C11 C13: library part CL10B104JB8NNNC, "Samsung Electro-Mechanics 0603 100nf"
C3 C6: library part CL10B225KP8NNNC, "Samsung Electro-Mechanics 0603 2.2uf"
C16 C17 C20 C21: library part 865080553013, "Wurth Elektronik 150uF 35 V dc Aluminium Electrolytic Capacitor, WCAP-ASLI Series 2000h 8 (Dia.) x 10.35mm", Manufacturer_Name="Wurth Elektronik", Mouser Part Number=710-865080553013, Datasheet Link=https://www.we-online.com/catalog/datasheet/865080553013.pdf, Geometry.Height=10.5mm, Manufacturer_Part_Number=865080553013, Mouser Price/Stock=https://www.mouser.co.uk/ProductDetail/Wurth-Elektronik/865080553013?qs=0KOYDY2FL29Thrvp1T0nKg%3D%3D
H1: "16 Pin 2x8 Through Hold IDC Connector", Color=Black, Manufacturer=Samtec, Manufacturer Part Number=TST-108-01-G-D, Max Operating Temperature=125°C, Min Operating Temperature=-55°C, Supplier Part Number 1=SAM10835-ND, Category="Headers and Wire Housings", ComponentLink1Description=https://datasheet.ciiva.com/739/tst-mkt-739845.pdf?src-supplier=Digi-Key, ComponentLink1URL=https://datasheet.ciiva.com/739/tst-mkt-739845.pdf?src-supplier=Digi-Key, ComponentLink2Description=https://datasheet.ciiva.com/10018/htst-10018510.pdf?src-supplier=Avnet, ComponentLink2URL=https://datasheet.ciiva.com/10018/htst-10018510.pdf?src-supplier=Avnet, Connector Type="Male Pin", Contact Material=Bronze, Contact Mating Length=0.25inch, Contact Plating=Gold, Depth=9.27mm, Gender=Male, Housing Color=Black, Housing Material=Polyester, Length=27.94mm, Mount="Through Hole", Number of Contacts=16, Number of Positions=16, Number of Rows=2, Orientation=Straight, Packaging=Rail/Tube, Pitch=2.54mm, Pricing 1="1=2.85000, 10=2.73600, 100=2.28000, 500=1.93800, 1000=1.65300, 5000=1.48200 (USD)", REACH SVHC="No SVHC", RoHS=Yes, Row Spacing=0.1inch, Stock 1=227, Supplier 1=Digi-Key, Termination=Solder
H2: "6 Pin 2X3 Through Hole Header"
H3: "8 Pin 2x4 Through Hold IDC Connector", Color=Black, Manufacturer=Samtec, Manufacturer Part Number=TST-105-01-G-D, Max Operating Temperature=125°C, Min Operating Temperature=-55°C, Supplier Part Number 1=SAM10835-ND, Category="Headers and Wire Housings", ComponentLink1Description=https://datasheet.ciiva.com/739/tst-mkt-739845.pdf?src-supplier=Digi-Key, ComponentLink1URL=https://datasheet.ciiva.com/739/tst-mkt-739845.pdf?src-supplier=Digi-Key, ComponentLink2Description=https://datasheet.ciiva.com/10018/htst-10018510.pdf?src-supplier=Avnet, ComponentLink2URL=https://datasheet.ciiva.com/10018/htst-10018510.pdf?src-supplier=Avnet, Connector Type="Male Pin", Contact Material=Bronze, Contact Mating Length=0.25inch, Contact Plating=Gold, Depth=9.27mm, Gender=Male, Housing Color=Black, Housing Material=Polyester, Length=27.94mm, Mount="Through Hole", Number of Contacts=16, Number of Positions=16, Number of Rows=2, Orientation=Straight, Packaging=Rail/Tube, Pitch=2.54mm, Pricing 1="1=2.85000, 10=2.73600, 100=2.28000, 500=1.93800, 1000=1.65300, 5000=1.48200 (USD)", REACH SVHC="No SVHC", RoHS=Yes, Row Spacing=0.1inch, Stock 1=227, Supplier 1=Digi-Key, Termination=Solder
IC1: "Integrated Circuit", Manufacturer_Name=Microchip, Manufacturer_Part_Number="AVR64DD32-I/PT | MULTI-VOLTAGE I/O", Datasheet Link=https://www.microchip.com/en-us/product/AVR64DD32, Height=1.2mm
LED1 LED2 LED3 LED4 LED6 LED7 LED8 LED9 LED10 LED11 LED12 LED13 LED14 LED15 LED16 LED19 LED20 LED21 LED22 LED23 LED24 LED25 LED26 LED27 LED28 LED29: library part 150060GS75000, "Wurth Elektronik 0603 green", Case Code (Imperial)=0603, Case Code (Metric)=1608, Color=Green, Forward Current=30mA, Forward Voltage=3.2V, Manufacturer="Wurth Electronics", Max Operating Temperature=85°C, Min Operating Temperature=-40°C, Package Quantity=4000, Test Current=20mA, Case/Package=0603, Category=LEDs, ComponentLink1Description=https://datasheet.ciiva.com/29562/150060gs75000-29562868.pdf?src-supplier=Digi-Key, ComponentLink1URL=https://datasheet.ciiva.com/29562/150060gs75000-29562868.pdf?src-supplier=Digi-Key, ComponentLink2Description=https://datasheet.ciiva.com/29279/759427-da-01-en-chipled-0603-w-kl-gruen-150060gs75000-29279201.pdf?src-supplier=Conrad, ComponentLink2URL=https://datasheet.ciiva.com/29279/759427-da-01-en-chipled-0603-w-kl-gruen-150060gs75000-29279201.pdf?src-supplier=Conrad, ComponentLink3Description=https://datasheet.ciiva.com/29562/150060gs75000-29562869.pdf?src-supplier=Digi-Key, ComponentLink3URL=https://datasheet.ciiva.com/29562/150060gs75000-29562869.pdf?src-supplier=Digi-Key, ComponentLink4Description=https://datasheet.ciiva.com/29562/150060gs75000-29562870.pdf?src-supplier=Digi-Key, ComponentLink4URL=https://datasheet.ciiva.com/29562/150060gs75000-29562870.pdf?src-supplier=Digi-Key, Dominant Wavelength=520nm, Height=0.7mm, Lead Free="Lead Free", Length=1.6mm, Lens Style=Clear,Rectangular, Luminous Intensity=430mcd, Manufacturer Part Number=150060GS75000, Mount="Surface Mount", Packaging="Tape and Reel", Pricing 1="1=0.14000, 50=0.13300, 100=0.11400, 500=0.09900 (USD)", REACH SVHC=Unknown, RoHS=Yes, Stock 1=71509, Supplier 1=Digi-Key, Viewing Angle=140°, Wavelength=520nm, Width=0.8mm
LED5 LED17: library part 150060RS75000, "Wurth Elektronik 0603 red", Case Code (Imperial)=0603, Case Code (Metric)=1608, Color=Green, Forward Current=30mA, Forward Voltage=3.2V, Manufacturer="Wurth Electronics", Manufacturer Part Number=150060GS75000, Max Operating Temperature=85°C, Min Operating Temperature=-40°C, Package Quantity=4000, Test Current=20mA, Case/Package=0603, Category=LEDs, ComponentLink1Description=https://datasheet.ciiva.com/29562/150060gs75000-29562868.pdf?src-supplier=Digi-Key, ComponentLink1URL=https://datasheet.ciiva.com/29562/150060gs75000-29562868.pdf?src-supplier=Digi-Key, ComponentLink2Description=https://datasheet.ciiva.com/29279/759427-da-01-en-chipled-0603-w-kl-gruen-150060gs75000-29279201.pdf?src-supplier=Conrad, ComponentLink2URL=https://datasheet.ciiva.com/29279/759427-da-01-en-chipled-0603-w-kl-gruen-150060gs75000-29279201.pdf?src-supplier=Conrad, ComponentLink3Description=https://datasheet.ciiva.com/29562/150060gs75000-29562869.pdf?src-supplier=Digi-Key, ComponentLink3URL=https://datasheet.ciiva.com/29562/150060gs75000-29562869.pdf?src-supplier=Digi-Key, ComponentLink4Description=https://datasheet.ciiva.com/29562/150060gs75000-29562870.pdf?src-supplier=Digi-Key, ComponentLink4URL=https://datasheet.ciiva.com/29562/150060gs75000-29562870.pdf?src-supplier=Digi-Key, Dominant Wavelength=520nm, Height=0.7mm, Lead Free="Lead Free", Length=1.6mm, Lens Style=Clear,Rectangular, Luminous Intensity=430mcd, Mount="Surface Mount", Packaging="Tape and Reel", Pricing 1="1=0.14000, 50=0.13300, 100=0.11400, 500=0.09900 (USD)", REACH SVHC=Unknown, RoHS=Yes, Stock 1=71509, Supplier 1=Digi-Key, Viewing Angle=140°, Wavelength=520nm, Width=0.8mm
LED18: library part 150060AS75000, "Wurth Elektronik 0603 amber", Case Code (Imperial)=0603, Case Code (Metric)=1608, Color=Green, Forward Current=30mA, Forward Voltage=3.2V, Manufacturer="Wurth Electronics", Manufacturer Part Number=150060GS75000, Max Operating Temperature=85°C, Min Operating Temperature=-40°C, Package Quantity=4000, Test Current=20mA, Case/Package=0603, Category=LEDs, ComponentLink1Description=https://datasheet.ciiva.com/29562/150060gs75000-29562868.pdf?src-supplier=Digi-Key, ComponentLink1URL=https://datasheet.ciiva.com/29562/150060gs75000-29562868.pdf?src-supplier=Digi-Key, ComponentLink2Description=https://datasheet.ciiva.com/29279/759427-da-01-en-chipled-0603-w-kl-gruen-150060gs75000-29279201.pdf?src-supplier=Conrad, ComponentLink2URL=https://datasheet.ciiva.com/29279/759427-da-01-en-chipled-0603-w-kl-gruen-150060gs75000-29279201.pdf?src-supplier=Conrad, ComponentLink3Description=https://datasheet.ciiva.com/29562/150060gs75000-29562869.pdf?src-supplier=Digi-Key, ComponentLink3URL=https://datasheet.ciiva.com/29562/150060gs75000-29562869.pdf?src-supplier=Digi-Key, ComponentLink4Description=https://datasheet.ciiva.com/29562/150060gs75000-29562870.pdf?src-supplier=Digi-Key, ComponentLink4URL=https://datasheet.ciiva.com/29562/150060gs75000-29562870.pdf?src-supplier=Digi-Key, Dominant Wavelength=520nm, Height=0.7mm, Lead Free="Lead Free", Length=1.6mm, Lens Style=Clear,Rectangular, Luminous Intensity=430mcd, Mount="Surface Mount", Packaging="Tape and Reel", Pricing 1="1=0.14000, 50=0.13300, 100=0.11400, 500=0.09900 (USD)", REACH SVHC=Unknown, RoHS=Yes, Stock 1=71509, Supplier 1=Digi-Key, Viewing Angle=140°, Wavelength=520nm, Width=0.8mm
R1 R2 R3 R4 R5 R6 R7 R8 R9 R10 R11 R12 R13 R14 R15 R16 R17 R18 R19 R20 R21 R22 R23 R24 R27 R28 R29 R30 R31 R32 R33 R34 R35 R36 R37 R40 R41 R42 R43 R44 R45 R46 R47 R48 R49 R50 R51 R52 R54 R55 R56 R57 R58 R60 R61 R62 R63 R64 R65 R66 R67 R68 R69 R70 R71 R72 R73 R76 R77 R78 R79 R80 R81 R82 R83 R84 R85 R86 R87 R88 R89 R90 R91 R92 R93 R96 R97 R98 R99 R100 R101 R102 R103 R104 R105 R106 R107 R108 R109 R110 R111 R112 R113 R114 R115 R116 R117 R118 R119 R120 R121 R122 R123 R124 R125 R126 R127 R128 R129 R148 R149 R150 R151 R152 R153 R154 R155 R156: library part RC0603JR-070RL, "YAGEO 0603 0 ohm", Manufacturer_Name=KEMET, Mouser Part Number=603-RC0603JR-070RL, Datasheet Link=https://datasheet.datasheetarchive.com/originals/distributors/Datasheets_SAMA/902f9e387b938f871d31120f5fc1d65e.pdf, Geometry.Height=0.55mm, Manufacturer_Part_Number=RC0603JR-070RL, Mouser Price/Stock=https://www.mouser.co.uk/ProductDetail/YAGEO/RC0603JR-070RL?qs=2cAdsCoAWRGWyPcuXgGiXQ%3D%3D
R25 R26 R38 R39: library part RC0603JR-07220RL, "YAGEO 0603 220 ohm", Manufacturer_Name=KEMET, Manufacturer_Part_Number=RC0603JR-070RL, Mouser Part Number=603-RC0603JR-070RL, Datasheet Link=https://datasheet.datasheetarchive.com/originals/distributors/Datasheets_SAMA/902f9e387b938f871d31120f5fc1d65e.pdf, Geometry.Height=0.55mm, Mouser Price/Stock=https://www.mouser.co.uk/ProductDetail/YAGEO/RC0603JR-070RL?qs=2cAdsCoAWRGWyPcuXgGiXQ%3D%3D
R53 R59: library part RT0603BRC07910RL, "YAGEO 0603 910 ohm", Manufacturer_Name=KEMET, Manufacturer_Part_Number=RC0603JR-070RL, Mouser Part Number=603-RC0603JR-070RL, Datasheet Link=https://datasheet.datasheetarchive.com/originals/distributors/Datasheets_SAMA/902f9e387b938f871d31120f5fc1d65e.pdf, Geometry.Height=0.55mm, Mouser Price/Stock=https://www.mouser.co.uk/ProductDetail/YAGEO/RC0603JR-070RL?qs=2cAdsCoAWRGWyPcuXgGiXQ%3D%3D
R74 R75 R94 R95: library part RC0603JR-0710L, "YAGEO 0603 10 ohm", Manufacturer_Name=KEMET, Manufacturer_Part_Number=RC0603JR-070RL, Mouser Part Number=603-RC0603JR-070RL, Datasheet Link=https://datasheet.datasheetarchive.com/originals/distributors/Datasheets_SAMA/902f9e387b938f871d31120f5fc1d65e.pdf, Geometry.Height=0.55mm, Mouser Price/Stock=https://www.mouser.co.uk/ProductDetail/YAGEO/RC0603JR-070RL?qs=2cAdsCoAWRGWyPcuXgGiXQ%3D%3D
R130 R131 R132 R133 R134 R135 R137 R138 R139 R140 R141 R142 R143 R144 R145 R146 R147 R157 R158 R159 R160 R161 R162 R163 R164 R165 R166 R167: library part RC0603FR-13180RL, "YAGEO 0603 180 ohm", Manufacturer_Name=KEMET, Manufacturer_Part_Number=RC0603JR-070RL, Mouser Part Number=603-RC0603JR-070RL, Datasheet Link=https://datasheet.datasheetarchive.com/originals/distributors/Datasheets_SAMA/902f9e387b938f871d31120f5fc1d65e.pdf, Geometry.Height=0.55mm, Mouser Price/Stock=https://www.mouser.co.uk/ProductDetail/YAGEO/RC0603JR-070RL?qs=2cAdsCoAWRGWyPcuXgGiXQ%3D%3D
R136: library part RC0603FR-0747KL, "YAGEO 0603 47", Manufacturer_Name=KEMET, Manufacturer_Part_Number=RC0603JR-070RL, Mouser Part Number=603-RC0603JR-070RL, Datasheet Link=https://datasheet.datasheetarchive.com/originals/distributors/Datasheets_SAMA/902f9e387b938f871d31120f5fc1d65e.pdf, Geometry.Height=0.55mm, Mouser Price/Stock=https://www.mouser.co.uk/ProductDetail/YAGEO/RC0603JR-070RL?qs=2cAdsCoAWRGWyPcuXgGiXQ%3D%3D
TP1 TP2 TP3 TP4 TP5 TP6 TP7 TP8 TP9 TP10 TP11 TP12 TP13 TP14 TP15 TP16 TP17 TP18 TP19 TP20 TP21 TP22 TP23 TP24 TP25 TP26: Color=Black, Manufacturer=Samtec, Manufacturer Part Number=TST-105-01-G-D, Max Operating Temperature=125°C, Min Operating Temperature=-55°C, Category="Headers and Wire Housings", ComponentLink1Description=https://datasheet.ciiva.com/739/tst-mkt-739845.pdf?src-supplier=Digi-Key, ComponentLink1URL=https://datasheet.ciiva.com/739/tst-mkt-739845.pdf?src-supplier=Digi-Key, ComponentLink2Description=https://datasheet.ciiva.com/10018/htst-10018510.pdf?src-supplier=Avnet, ComponentLink2URL=https://datasheet.ciiva.com/10018/htst-10018510.pdf?src-supplier=Avnet, Connector Type="Male Pin", Contact Material=Bronze, Contact Mating Length=0.25inch, Contact Plating=Gold, Depth=9.27mm, Gender=Male, Housing Color=Black, Housing Material=Polyester, Length=27.94mm, Mount="Through Hole", Number of Contacts=16, Number of Positions=16, Number of Rows=2, Orientation=Straight, Packaging=Rail/Tube, Pitch=2.54mm, Pricing 1="1=2.85000, 10=2.73600, 100=2.28000, 500=1.93800, 1000=1.65300, 5000=1.48200 (USD)", REACH SVHC="No SVHC", RoHS=Yes, Row Spacing=0.1inch, Stock 1=227, Supplier 1=Digi-Key, Termination=Solder
U1: "Hex Inverters", Manufacturer_Name="Texas Instruments", Mouser Part Number=595-SN74AC04PWR, Datasheet Link=http://www.ti.com/lit/gpn/sn74ac04, Geometry.Height=1.2mm, Manufacturer_Part_Number=SN74AC04PWR, Mouser Price/Stock=https://www.mouser.co.uk/ProductDetail/Texas-Instruments/SN74AC04PWR?qs=RZS%252BpEsUn7pRvPNqsga4SA%3D%3D
U2: "Octal Buffers/Drivers With 3-State Outputs", Manufacturer_Name="Texas Instruments", Mouser Part Number=595-SN74ABT240ADBR, Datasheet Link=http://www.ti.com/lit/gpn/sn74abt240a, Geometry.Height=2mm, Manufacturer_Part_Number=SN74ABT240ADBR, Mouser Price/Stock=https://www.mouser.co.uk/ProductDetail/Texas-Instruments/SN74ABT240ADBR?qs=JHHQeKcAU3Dt82k%252BVyiYdw%3D%3D

## Free pads (board coordinates)
  round 200 hole 170: 37(200,200) 37(200,3800) 37(5400,200) 37(5400,3800)

## Via types
v1: diameter 50, hole 28, Top Layer to Bottom Layer, 200 vias

## Nets (pads, with @x,y where several pads share a name; then routed paths per layer and width w, separated by ;. In a path a pad name is that pad's centre, name@x,y a point inside that pad or via, vN(x,y) a via of type N, cw(c..) or ccw(c..) an arc to the next point about the centre after c; other vN are vias at no path point)
+3.3: H1.3 R136.1 TP1.1 | length 7317.2
  Bottom Layer w10: H1.3@200,1800 105.86,1800 100,1805.86 100,3510 130,3540 4902.35,3540 4942.35,3500 ; R136.1@4860,3343.5 4936.49,3343.5 4942.35,3349.36 4942.35,3500 ; TP1.1@5210,3410 5210,3520 5190,3540 4980,3540 4980,3537.65 4942.35,3500
+5: B1.2 B2.1 B4.1 B6.6 B7.6 B8.8 B9.8 B10.6 B11.6 B12.8 B13.8 B14.8 B15.8 B16.8 B17.8 C2.2 C5.2 C9.1 C10.1 C11.1 C12.1 C13.1 C14.1 H1.1 H2.2 IC1.10 IC1.18 IC1.28 R25.1 R26.2 R53.1 R59.1 R130.2 R131.2 R132.2 R133.2 R134.2 R135.2 R137.2 R138.2 R139.2 R140.2 R141.2 R142.2 R143.2 R144.2 R145.2 R146.2 R147.2 R157.2 R158.2 R159.2 R160.2 R161.2 R162.2 R163.2 R164.2 R165.2 R166.2 R167.2 U1.14 U2.20 | length 9950.5
  Top Layer w10: v1(390,610) 391.5,611.5 485.86,611.5 ; C2.2@480,411.5 480,605.64 485.86,611.5 ; R53.1@550,611.5 485.86,611.5 ; U2.20@639.76,3015.16 639.76,3044.14 645.62,3050 864.14,3050 884.14,3030 v1(890,3030) ; v1(750,540) 760.82,540 772.32,551.5 845.86,551.5 ; C5.2@850,351.5 840,361.5 840,545.64 845.86,551.5 ; R59.1@920,551.5 845.86,551.5 ; v1(1250,2630) 1251.5,2631.5 R25.1@1360,2631.5 R26.2@1430,2631.5 1480,2631.5 1480,2538.65 1485.86,2532.8 B1.2@1553.39,2532.8 ; B4.1@1603.39,299.37 1659.37,299.37 1695,335 1695,395 v1@1690,400 ; B2.1@1613.39,599.37 1613.39,633.39 1664,684 v1@1694,684 ; v1(1720,1000) 1724.14,1000 1730,1005.86 1730,1190 1801.26,1261.26 IC1.10@1801.26,1323.15 1801.26,1411.26 1810,1420 1900,1420 ; v1(1940,1860) 1940,1778.28 1895.75,1734.03 IC1.28@1895.75,1656.85 1895.75,1424.25 1900,1420 ; IC1.18@2046.85,1411.26 2042.17,1415.94 2011.6,1415.94 2007.55,1420 1900,1420 ; U1.14@2645.67,2846.77 2645.67,2935.67 2680,2970 v1(2690,2970) ; v1(2970,850) 2996.73,823.27 B8.8@2996.73,765 ; B12.8@2996.73,335 3010.87,335 3018.67,342.8 3018.67,356.94 3041.73,380 v1(3100,380) ; v1@3060,3330 3070,3340 v1(3070,3350) ; v1(3540,1260) 3540,1324.14 3545.86,1330 3640.87,1330 3646.73,1324.14 B17.8@3646.73,1255 ; v1(3540,1660) 3540,1670 3550,1680 3550,1714.14 3555.86,1720 3640.87,1720 3646.73,1714.14 B15.8@3646.73,1655 ; v1(3540,2460) 3540,2510 3550,2520 3630,2520 3646.73,2503.27 B14.8@3646.73,2455 ; v1@3550,2060 3550,2134.14 3555.86,2140 3644.14,2140 3650,2134.14 3650,2058.27 B16.8@3646.73,2055 ; v1(3910,420) 4010,420 4016.73,413.27 B13.8@4016.73,335 ; v1(3910,860) 4000,860 4016.73,843.27 B9.8@4016.73,765 ; v1(4770,530) 4918.8,530 4924.65,535.86 B11.6@4924.65,596.61 ; v1(4770,1030) 4917.21,1030 4923.06,1035.86 4923.06,1109.88 B7.6@4924.8,1111.61 ; v1(4770,1530) 4910,1530 4924.8,1544.8 B10.6@4924.8,1611.61 ; v1(4770,2030) 4918.94,2030 4924.8,2035.86 B6.6@4924.8,2111.61
  Bottom Layer w10: v1(673.5,3343.5) R144.2@770,3343.5 R143.2@870,3343.5 R142.2@970,3343.5 R141.2@1070,3343.5 R140.2@1170,3343.5 R139.2@1270,3343.5 R138.2@1370,3343.5 R137.2@1470,3343.5 ; R145.2@1640,3343.5 R146.2@1780,3343.5 R147.2@1930,3343.5 R130.2@2090,3343.5 R131.2@2210,3343.5 R132.2@2410,3343.5 R133.2@2570,3343.5 R134.2@2730,3343.5 2823.5,3343.5 2830,3350 v1(2840,3350) 2846.5,3343.5 R162.2@2950,3343.5 ; C11.1@1851.5,1520 1862.24,1530.75 1862.24,1564.14 1868.1,1570 1910,1570 ; v1(1940,1860) 1910,1830 1910,1570 ; v1(3070,3350) 3070,3349.36 3075.86,3343.5 R161.2@3160,3343.5 ; v1(3300,3350) 3300,3349.36 3305.86,3343.5 R160.2@3410,3343.5 R159.2@3560,3343.5 R158.2@3700,3343.5 R157.2@3850,3343.5 R166.2@4020,3343.5 R165.2@4170,3343.5 R164.2@4320,3343.5 R163.2@4460,3343.5 R167.2@4660,3343.5 ; v1(5040,3240) R135.2@5040,3343.5 ; C9.1@1910,1460 1851.5,1460 C10.1@1851.5,1400 C13.1@1908.5,1400 1910,1401.5 C9.1@1910,1460 ; C9.1@1910,1460 1910,1518.5 C14.1@1908.5,1520 1909.34,1520.84 1909.34,1547.84 1910,1548.5 1910,1570
  other v1: 1695,400 1695,684 3540,2060
ADC_CS: B1.1 LED29.1 R36.1 | length 6222.7
  Top Layer w10: v1(1230,1380) R36.1@1388.5,1380 ; v1(1420,2080) 1640,2080 1660,2100 1660,2634.14 1654.14,2640 1550,2640 ; B1.1@1553.39,2558.39 1551.61,2558.39 1550,2560 1550,2640 ; LED29.1@4660,3343.5 4656.5,3340 4575.86,3340 4570,3345.86 4570,3530 4560,3540 1555.86,3540 1550,3534.14 1550,2640
  Bottom Layer w10: v1(1230,1380) 1414.14,1380 1420,1385.86 v1(1420,2080)
Channel_1_Ref: B3.1 C3.2 R52.1 R53.2 | length 2715.2
  Top Layer w10: B3.1@648.66,417.4 642.76,411.5 C3.2@550,411.5 R53.2@550,548.5 618.5,548.5 630,560 630,740 650,760 1990,760 2040,810 2180,810 2190,800 2190,430 2180,420 1997.35,420 1991.5,425.86 R52.1@1991.5,470
Channel_2_Ref: B5.1 C6.2 R59.2 R60.1 | length 1667.6
  Top Layer w10: R59.2@920,488.5 C6.2@920,351.5 1002.76,351.5 B5.1@1008.66,357.4 ; 1010,370 1010,414.14 1015.86,420 1144.14,420 1150,414.14 1150,90 1170,70 1985.64,70 1991.5,75.86 R60.1@1991.5,150
CPU_CS: R12.2 R45.2 R156.1 | length 4351.2
  Top Layer w10: R12.2@931.5,1450 1054.14,1450 1060,1444.14 1060,805.86 1070,795.86 1904.14,795.86 1910,801.72 v1(1910,1020) R45.2@1910,1108.5 ; v1(1930,2880) R156.1@1930,2978.5
  Bottom Layer w10: v1(1910,1020) 1910,1194.14 1904.14,1200 1740,1200 1730,1210 1730,2060 1770,2100 1935.36,2100 2010,2174.64 2010,2874.14 2004.14,2880 v1(1930,2880)
CPU_D0: R1.1 R17.1 U2.2 | length 3131.5
  Top Layer w10: U2.2@360.24,2989.57 125.86,2989.57 120,2983.71 120,2175.86 125.86,2170 530,2170 600,2100 600,1970 630,1940 630,1901.5 R1.1@631.5,1900 1150,1900 1170,1920 1170,1950 1250,2030 1804.14,2030 1810,2024.14 R17.1@1810,1920
CPU_D1: R3.1 R19.1 U2.4 | length 3234.7
  Top Layer w10: U2.4@360.24,2938.39 145.86,2938.39 140,2932.53 140,2195.86 145.86,2190 644.14,2190 670,2164.14 v1(670,2020) ; R3.1@631.5,1800 v1(710,1800) 760,1800 760,1874.14 765.86,1880 1160,1880 1190,1910 1190,1940 1260,2010 1744.14,2010 1750,2004.14 R19.1@1750,1921.5
  Bottom Layer w10: v1(670,2020) 710,1980 v1(710,1800)
CPU_D2: R6.1 R21.1 U2.6 | length 3350.4
  Top Layer w10: U2.6@360.24,2887.2 165.86,2887.2 160,2881.35 160,2215.86 165.86,2210 780,2210 800,2190 v1(800,1970) ; R6.1@631.5,1700 v1@790,1700 ; v1(800,1700) 800,1854.14 805.86,1860 1170,1860 1220,1910 1220,1940 1270,1990 1684.14,1990 1690,1984.14 R21.1@1690,1921.5
  Bottom Layer w10: v1(800,1700) v1(800,1970)
CPU_D3: R9.1 R23.1 U2.8 | length 3041
  Top Layer w10: U2.8@360.24,2836.02 185.86,2836.02 180,2830.17 180,2235.86 185.86,2230 820,2230 860,2190 v1(860,2050) ; R9.1@631.5,1600 v1(800,1600) ; v1(1300,1670) 1378.5,1670 R23.1@1388.5,1680
  Bottom Layer w10: v1(860,2050) 755.86,2050 750,2044.14 750,1610 760,1600 v1(800,1600) 964.14,1600 970,1605.86 970,1664.14 975.86,1670 v1(1300,1670)
CPU_D4: R11.1 R27.1 U2.11 | length 3212.7
  Top Layer w10: v1(550,2310) 550,2255.86 544.14,2250 205.86,2250 200,2255.86 200,2674.14 205.86,2680 633.91,2680 639.76,2685.86 U2.11@639.76,2784.84 ; R11.1@631.5,1500 v1(720,1500) ; v1(1230,1620) R27.1@1388.5,1620
  Bottom Layer w10: v1(550,2310) 550,1505.86 555.86,1500 990,1500 1000,1510 1000,1610 1010,1620 v1(1230,1620)
CPU_D5: R13.1 R29.1 U2.13 | length 3583
  Top Layer w10: v1(450,2320) 450,2280 440,2270 225.86,2270 220,2275.86 220,2654.14 225.86,2660 703.43,2660 720,2676.57 720,2830.17 714.14,2836.02 U2.13@639.76,2836.02 ; R13.1@631.5,1400 v1(800,1400) ; v1(1300,1550) 1310.82,1550 1320.82,1560 R29.1@1388.5,1560
  Bottom Layer w10: v1(450,2320) 450,1410 460,1400 v1(800,1400) 1014.14,1400 1020,1405.86 1020,1554.14 1025.86,1560 1274.14,1560 1276.49,1557.65 1292.35,1557.65 v1(1300,1550)
CPU_D6: R15.1 R31.1 U2.15 | length 3790.1
  Top Layer w10: v1(400,2400) 370,2370 370,2295.86 364.14,2290 245.86,2290 240,2295.86 240,2634.14 245.86,2640 720,2640 740,2660 740,2871.35 724.14,2887.2 U2.15@639.76,2887.2 ; R15.1@631.5,1300 v1(720,1300) ; v1(1230,1500) R31.1@1388.5,1500
  Bottom Layer w10: v1(400,2400) 370,2370 370,2250 430,2190 430,1305.86 435.86,1300 v1(720,1300) 1034.14,1300 1040,1305.86 1040,1490 1050,1500 v1(1230,1500)
CPU_D7: R16.1 R33.1 U2.17 | length 3988.2
  Top Layer w10: v1(320,2400) 320,2315.86 314.14,2310 265.86,2310 260,2315.86 260,2614.14 265.86,2620 740,2620 760,2640 760,2932.53 754.14,2938.39 U2.17@639.76,2938.39 ; R16.1@631.5,1200 v1(800,1200) ; v1(1300,1440) R33.1@1388.5,1440
  Bottom Layer w10: v1(320,2400) 320,2240 410,2150 410,1205.86 415.86,1200 v1(800,1200) 1060,1200 1060,1430 1070,1440 v1(1300,1440)
CPU_nInt: R7.2 R47.2 R154.1 | length 3800.3
  Top Layer w10: R7.2@931.5,1650 1094.14,1650 1100,1644.14 ; v1(1097.65,1792.35) 1097.65,1776.49 1100,1774.14 1100,1644.14 ; v1(1640,2870) R154.1@1640,2978.5 ; R47.2@1790,1108.5 1790,841.72 1783.28,835 1106.72,835 1100,841.72 1100,1644.14
  Bottom Layer w10: v1(1097.65,1792.35) 1097.65,2847.65 1120,2870 v1(1640,2870)
CPU_Reset: R14.2 R20.2 R155.1 | length 5299.3
  Top Layer w10: R14.2@931.5,1350 1034.14,1350 1040,1344.14 1040,790 1054.14,775.86 1949,775.86 1960,786.86 1960,914.14 1965.86,920 v1(2350,920) ; v1(1780,2870) R155.1@1780,2978.5 ; R20.2@2090,1930 v1(2090,2030)
  Bottom Layer w10: v1(1780,2870) 1780,3104.14 1785.86,3110 2070,3110 2090,3090 v1(2090,2030) 2334.14,2030 2350,2014.14 v1(2350,920)
CPU_RnW: R10.2 R46.2 R148.1 | length 4617.1
  Top Layer w10: R10.2@931.5,1550 1074.14,1550 1080,1544.14 1080,821.72 1085.86,815.86 1844.14,815.86 1850,821.72 v1(1850,930) R46.2@1850,1108.5 ; v1(1850,2730) 1850,2774.14 1855.86,2780 2120,2780 2120,2830 2130,2840 R148.1@2168.5,2840
  Bottom Layer w10: v1(1850,930) 1850,1144.14 1844.14,1150 1720,1150 1710,1160 1710,2090 1740,2120 1910,2120 1980,2190 1980,2714.14 1974.14,2720 1875.86,2720 1873.51,2722.35 1857.65,2722.35 v1(1850,2730)
CPU_RnW_Inverted: LED1.1 U1.2 U1.3 | length 1083.2
  Top Layer w10: LED1.1@2090,3343.5 2090,2970 2103.25,2956.75 2476.75,2956.75 2490,2943.5 2490,2825.86 ; U1.3@2414.33,2795.59 2484.14,2795.59 2490,2801.45 2490,2825.86 ; U1.2@2414.33,2821.18 2415.51,2820 2484.14,2820 2490,2825.86
DAC_CS_0: LED23.1 R32.2 R57.1 | length 4159.6
  Top Layer w10: R57.1@1991.5,590 2164.14,590 2170,595.86 2170,700 2137.65,732.35 2117.65,732.35 v1(2110,740) ; v1(2260,1340) 2267.65,1347.65 2283.51,1347.65 2285.86,1350 2584.14,1350 2590,1355.86 v1(2590,1470) R32.2@2381.5,1470 ; v1(3160,3190) LED23.1@3160,3343.5
  Bottom Layer w10: v1(2110,740) 2117.65,747.65 2137.65,747.65 2170,780 2170,1140 2260,1230 v1(2260,1340) ; v1(2590,1470) 2700,1470 2740,1510 2740,1834.14 2745.86,1840 2840,1840 2840,3190 2880,3230 3145.86,3230 3154.64,3221.21 3154.64,3195.36 v1(3160,3190)
DAC_CS_1: LED24.1 R34.2 R64.1 | length 4119.2
  Top Layer w10: R64.1@1991.5,270 2254.14,270 2260,275.86 v1(2260,810) ; v1(2260,980) v1(2530,980) ; R34.2@2381.5,1410 v1(2520,1410) ; v1(2950,3190) LED24.1@2950,3343.5
  Bottom Layer w10: v1(2260,810) v1(2260,980) ; v1(2530,980) 2530,1384.14 2527.65,1386.49 2527.65,1402.35 v1(2520,1410) 2690,1410 2760,1480 2760,1814.14 2765.86,1820 2860,1820 2860,3160 2890,3190 v1(2950,3190)
DIN: B1.6 R40.1 R55.1 R62.1 R84.1 R85.1 R104.1 R105.1 R110.1 R112.1 R122.1 R124.1 R149.1 | length 12645
  Top Layer w10: v1(1310,890) 1270,850 1130,850 1115,865 1115,1314.14 1120.86,1320 R40.1@1388.5,1320 ; B1.6@1726.61,2507.2 1907.2,2507.2 1907.2,2734.14 1913.06,2740 R149.1@2168.5,2740 ; v1(1910,2510) 3010,2510 3050,2550 3180,2550 3280,2650 v1(3910,2650) ; R62.1@1991.5,210 v1(2280,210) v1(2480,210) 2588.5,210 R104.1@2598.5,220 ; R55.1@1991.5,530 v1(2130,530) ; v1(2480,390) 2480,644.14 2485.86,650 R84.1@2598.5,650 ; R105.1@3628.5,220 v1(3450,220) 3450,634.14 3465.86,650 R85.1@3628.5,650 ; R124.1@3851.5,1090 v1(3930,1090) ; R112.1@3851.5,1490 v1(3930,1490) ; R122.1@3851.5,1890 v1(3930,1890) ; R110.1@3851.5,2310 v1(3930,2310)
  Bottom Layer w10: v1(1910,2510) 1910,2170 1880,2140 1700,2140 1580,2020 1580,1090 1320,1090 1310,1080 v1(1310,890) 1310,400.86 1315.86,395 1594.14,395 1600,400.86 1600,480 1660,540 2104.14,540 2106.49,537.65 2122.35,537.65 v1(2130,530) 2100,500 2100,255.86 2145.86,210 v1(2280,210) ; v1(2480,390) v1(2480,210) 3074.14,210 3084.14,220 v1(3450,220) ; v1(3910,2650) 3910,2644.14 3930,2624.14 v1(3930,1890) v1(3930,1490) v1(3930,1090)
DOUT: B1.7 R42.1 R108.1 R109.1 R120.1 R121.1 R150.1 | length 7178.6
  Top Layer w10: R42.1@1388.5,1260 1388.5,1051.5 v1(1510,930) ; B1.7@1726.61,2532.8 1784.14,2532.8 1790,2538.65 1790,2780 1820,2810 2024.14,2810 2030,2815.86 2030,2894.14 2035.86,2900 v1(2290,2900) ; v1(2290,2630) 2350,2570 v1(2960,2570) ; v1(2710,870) 2710,980 2880,1150 v1(2880,1190) R121.1@3198.5,1190 ; v1(2881.5,1351.5) 2881.5,1600 v1(3080,1600) R109.1@3198.5,1600 ; R150.1@2881.5,2660 v1(2960,2660) ; R120.1@3198.5,2000 3188.5,1990 v1(3080,1990) 2887.35,1990 2881.5,1995.86 2881.5,2384.14 2887.35,2390 2944.92,2390 2957.05,2402.13 2978.7,2402.13 2990.82,2390 R108.1@3198.5,2390
  Bottom Layer w10: v1(1510,930) 1510,790 1530,770 1820,770 1830,760 1830,630 1845,615 2675,615 2710,650 v1(2710,870) ; v1(2290,2630) v1(2290,2900) ; v1(2880,1190) 2881.5,1191.5 v1(2881.5,1351.5) ; v1(2960,2660) 2960,2427.98 2960.22,2427.76 2960.22,2409.78 v1(2967.87,2402.13) ; v1(3080,1600) v1(3080,1990)
Front_Left_AMP: R66.1 R81.2 | length 2684
  Top Layer w10: R81.2@3181.5,660 3364.14,660 3370,665.86 3370,950 3420,1000 4324.14,1000 4330,1005.86 4330,1350 4370,1390 4370,1864.14 4375.86,1870 R66.1@4718.5,1870
Front_Left_Res: C1.2 R77.2 | length 2066.7
  Top Layer w10: C1.2@1421.5,660 v1@1524.14,660 ; R77.2@3181.5,720 v1(3260,720)
  Bottom Layer w10: v1@1524.14,660 1524.14,605.86 1530,600 2380,600 2864.14,600 2870,605.86 2870,680 2910,720 v1(3260,720)
  other v1: 1525,660
Front_Left_Speaker: C16.2 R48.1 | length 1536.4
  Top Layer w10: R48.1@5088.5,2900 4975.86,2900 4970,2894.14 4970,2460 5474.14,2460 5480,2454.14 5480,2095.86 5474.14,2090 C16.2@5371.86,2090
Front_Right_AMP: R86.1 R101.2 | length 2625
  Top Layer w10: R101.2@3181.5,230 3388.28,230 3394.14,235.86 3394.14,952.93 3421.21,980 4354.14,980 4360,985.86 4360,1320 4410,1370 R86.1@4718.5,1370
Front_Right_Res: C4.2 R97.2 | length 2379.3
  Top Layer w10: C4.2@1421.5,440 v1@1520,440 ; R97.2@3181.5,290 v1(3280,290)
  Bottom Layer w10: v1(1525,440) 1525,575 1535,585 2554.14,585 2560,579.14 2560,295.86 2565.86,290 v1(3280,290)
Front_Right_Speaker: C20.2 R49.1 | length 1875.6
  Top Layer w10: R49.1@5088.5,2800 5020,2800 5010,2790 5010,2490 5480,2490 5500,2470 5500,1605.86 5494.14,1600 C20.2@5371.86,1600